# Altium PCB Flight-Controller.PcbDoc (part 1 of 3)
Units mm, origin at the board's own origin, x right, y up, seen from the top; angles counter-clockwise.
Board outline 68.4 x 90 mm, 8 copper layers (Top Layer (SIG), Int1 (GND), Int2 (PWR), Int3 (SIG), Int4 (GND), Int5 (SIG), Int6 (GND), Bottom Layer (SIG)), stack 1.559 mm thick; 188 components, 169 nets, 851 pads, 1097 vias.
Unrouted connection lines stored in the file: 2.
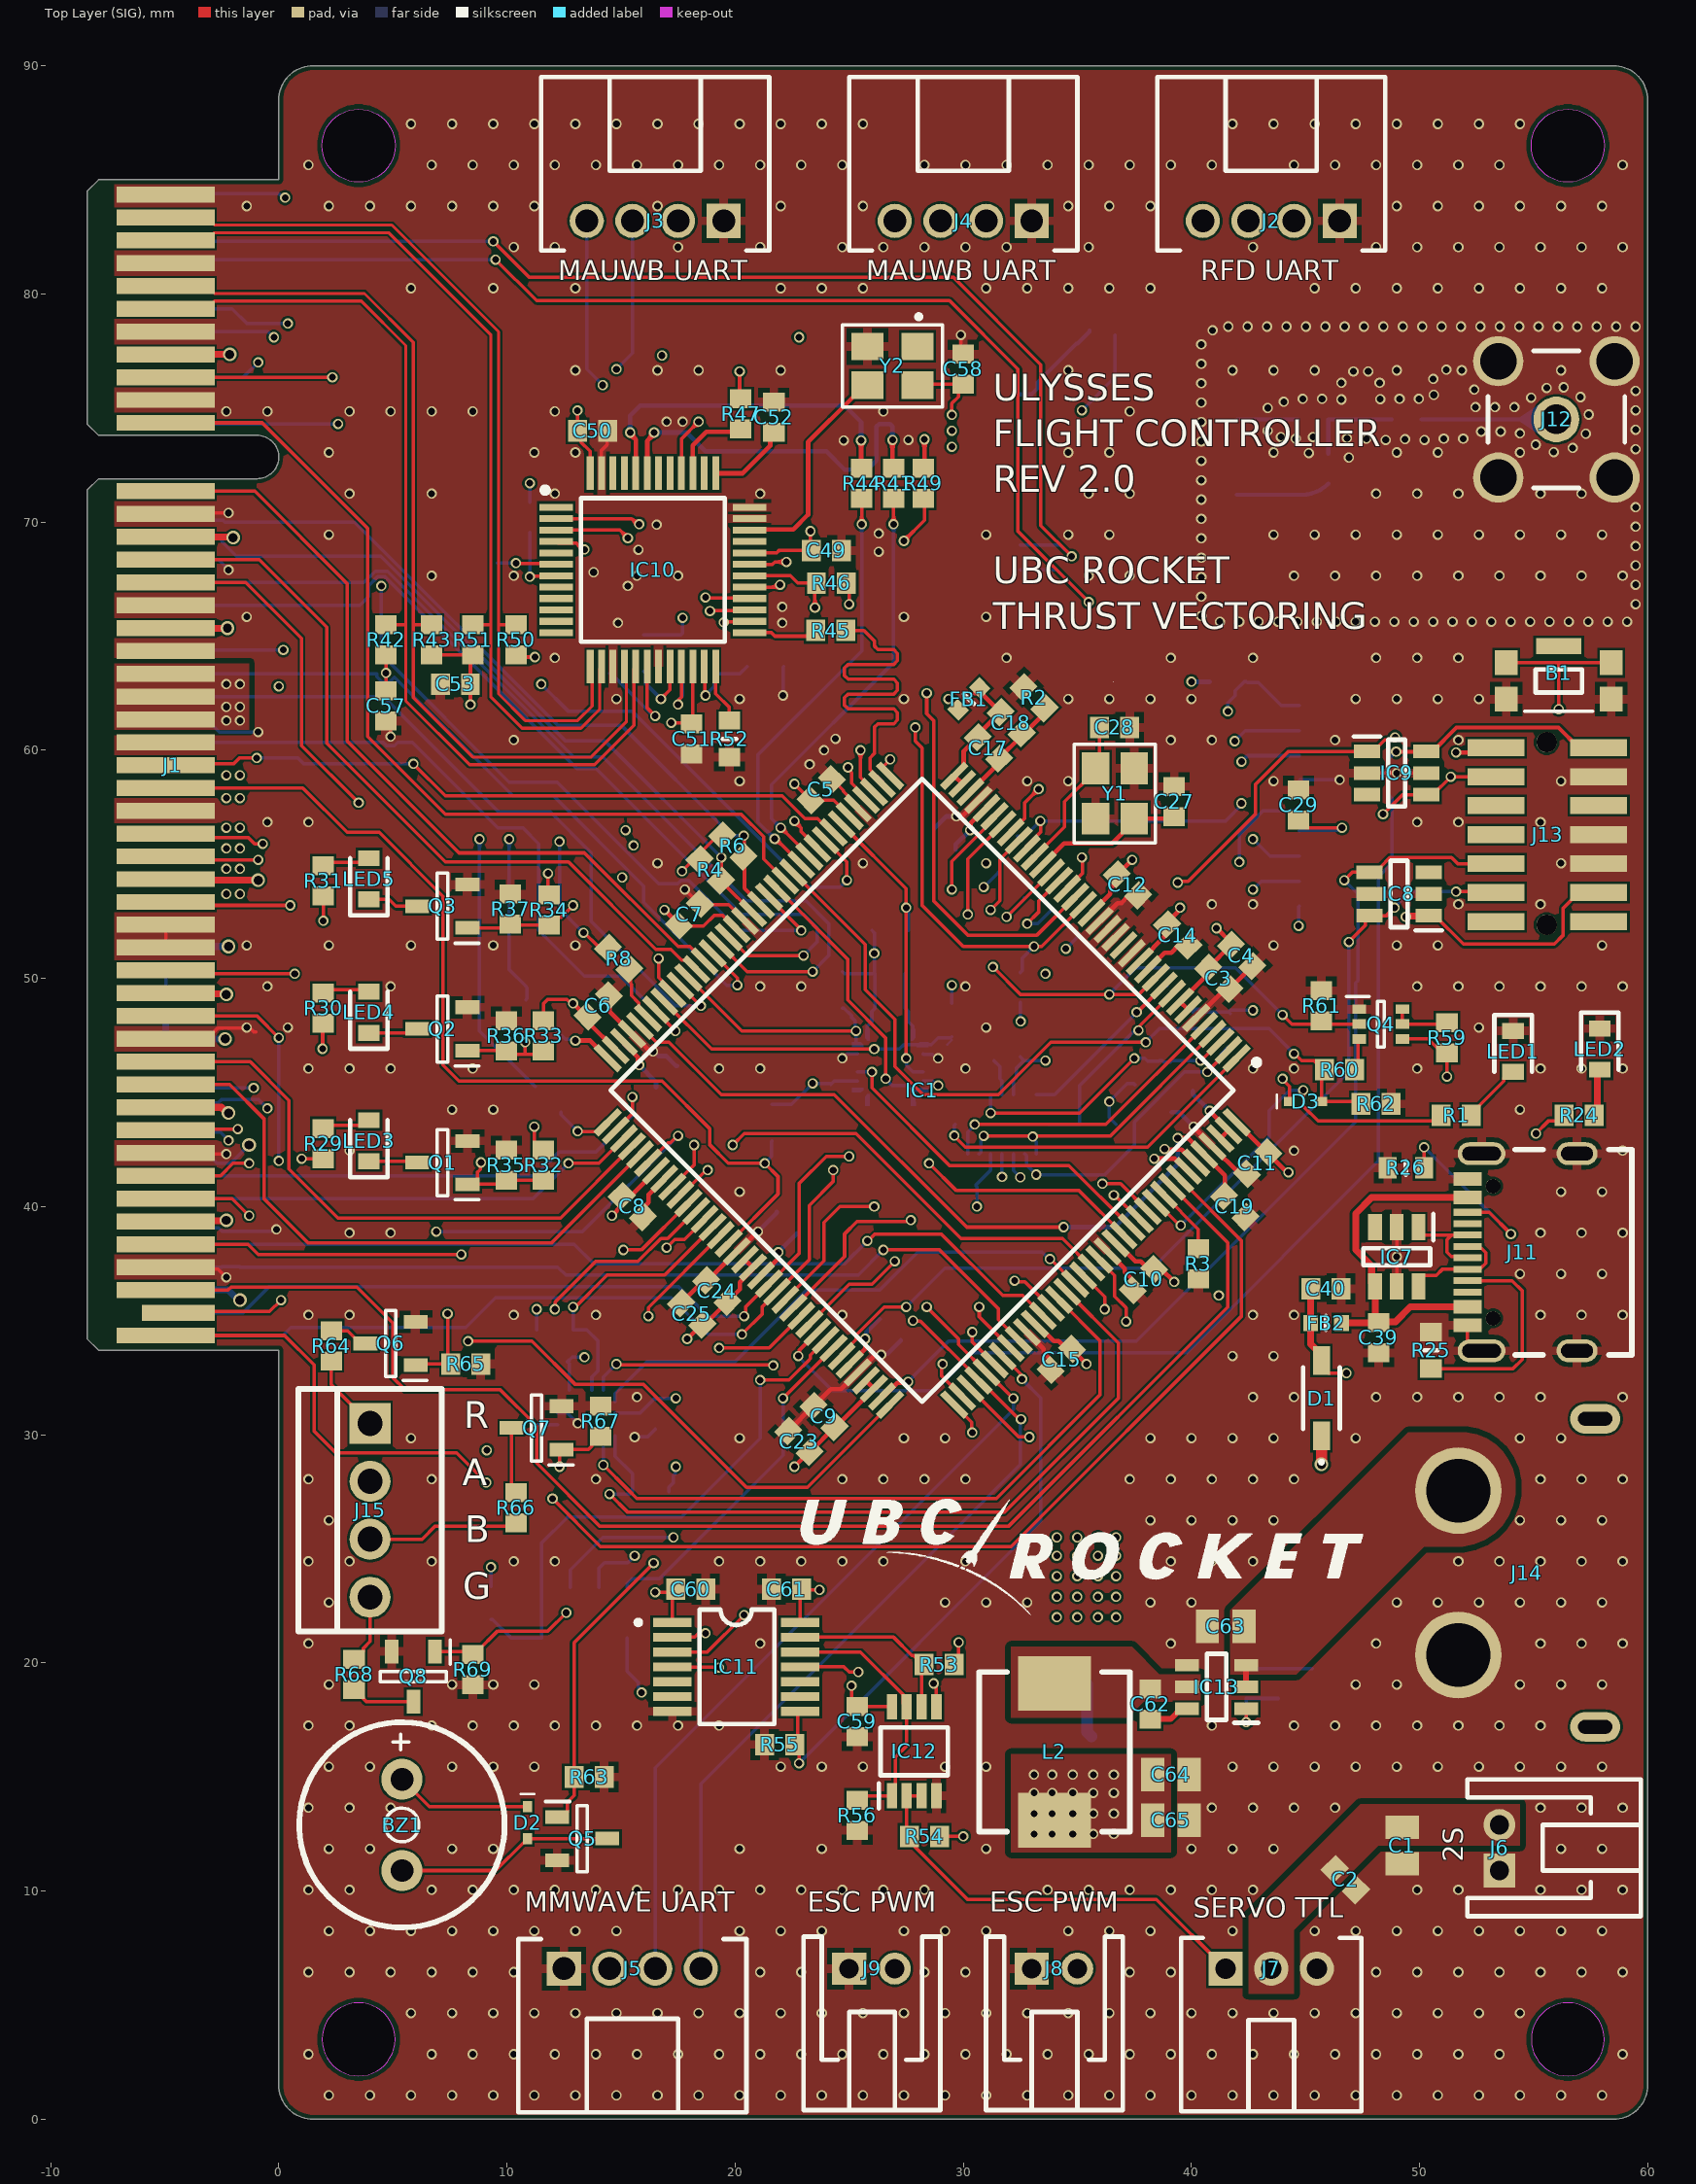
[diagram p0: Top Layer (SIG) view]
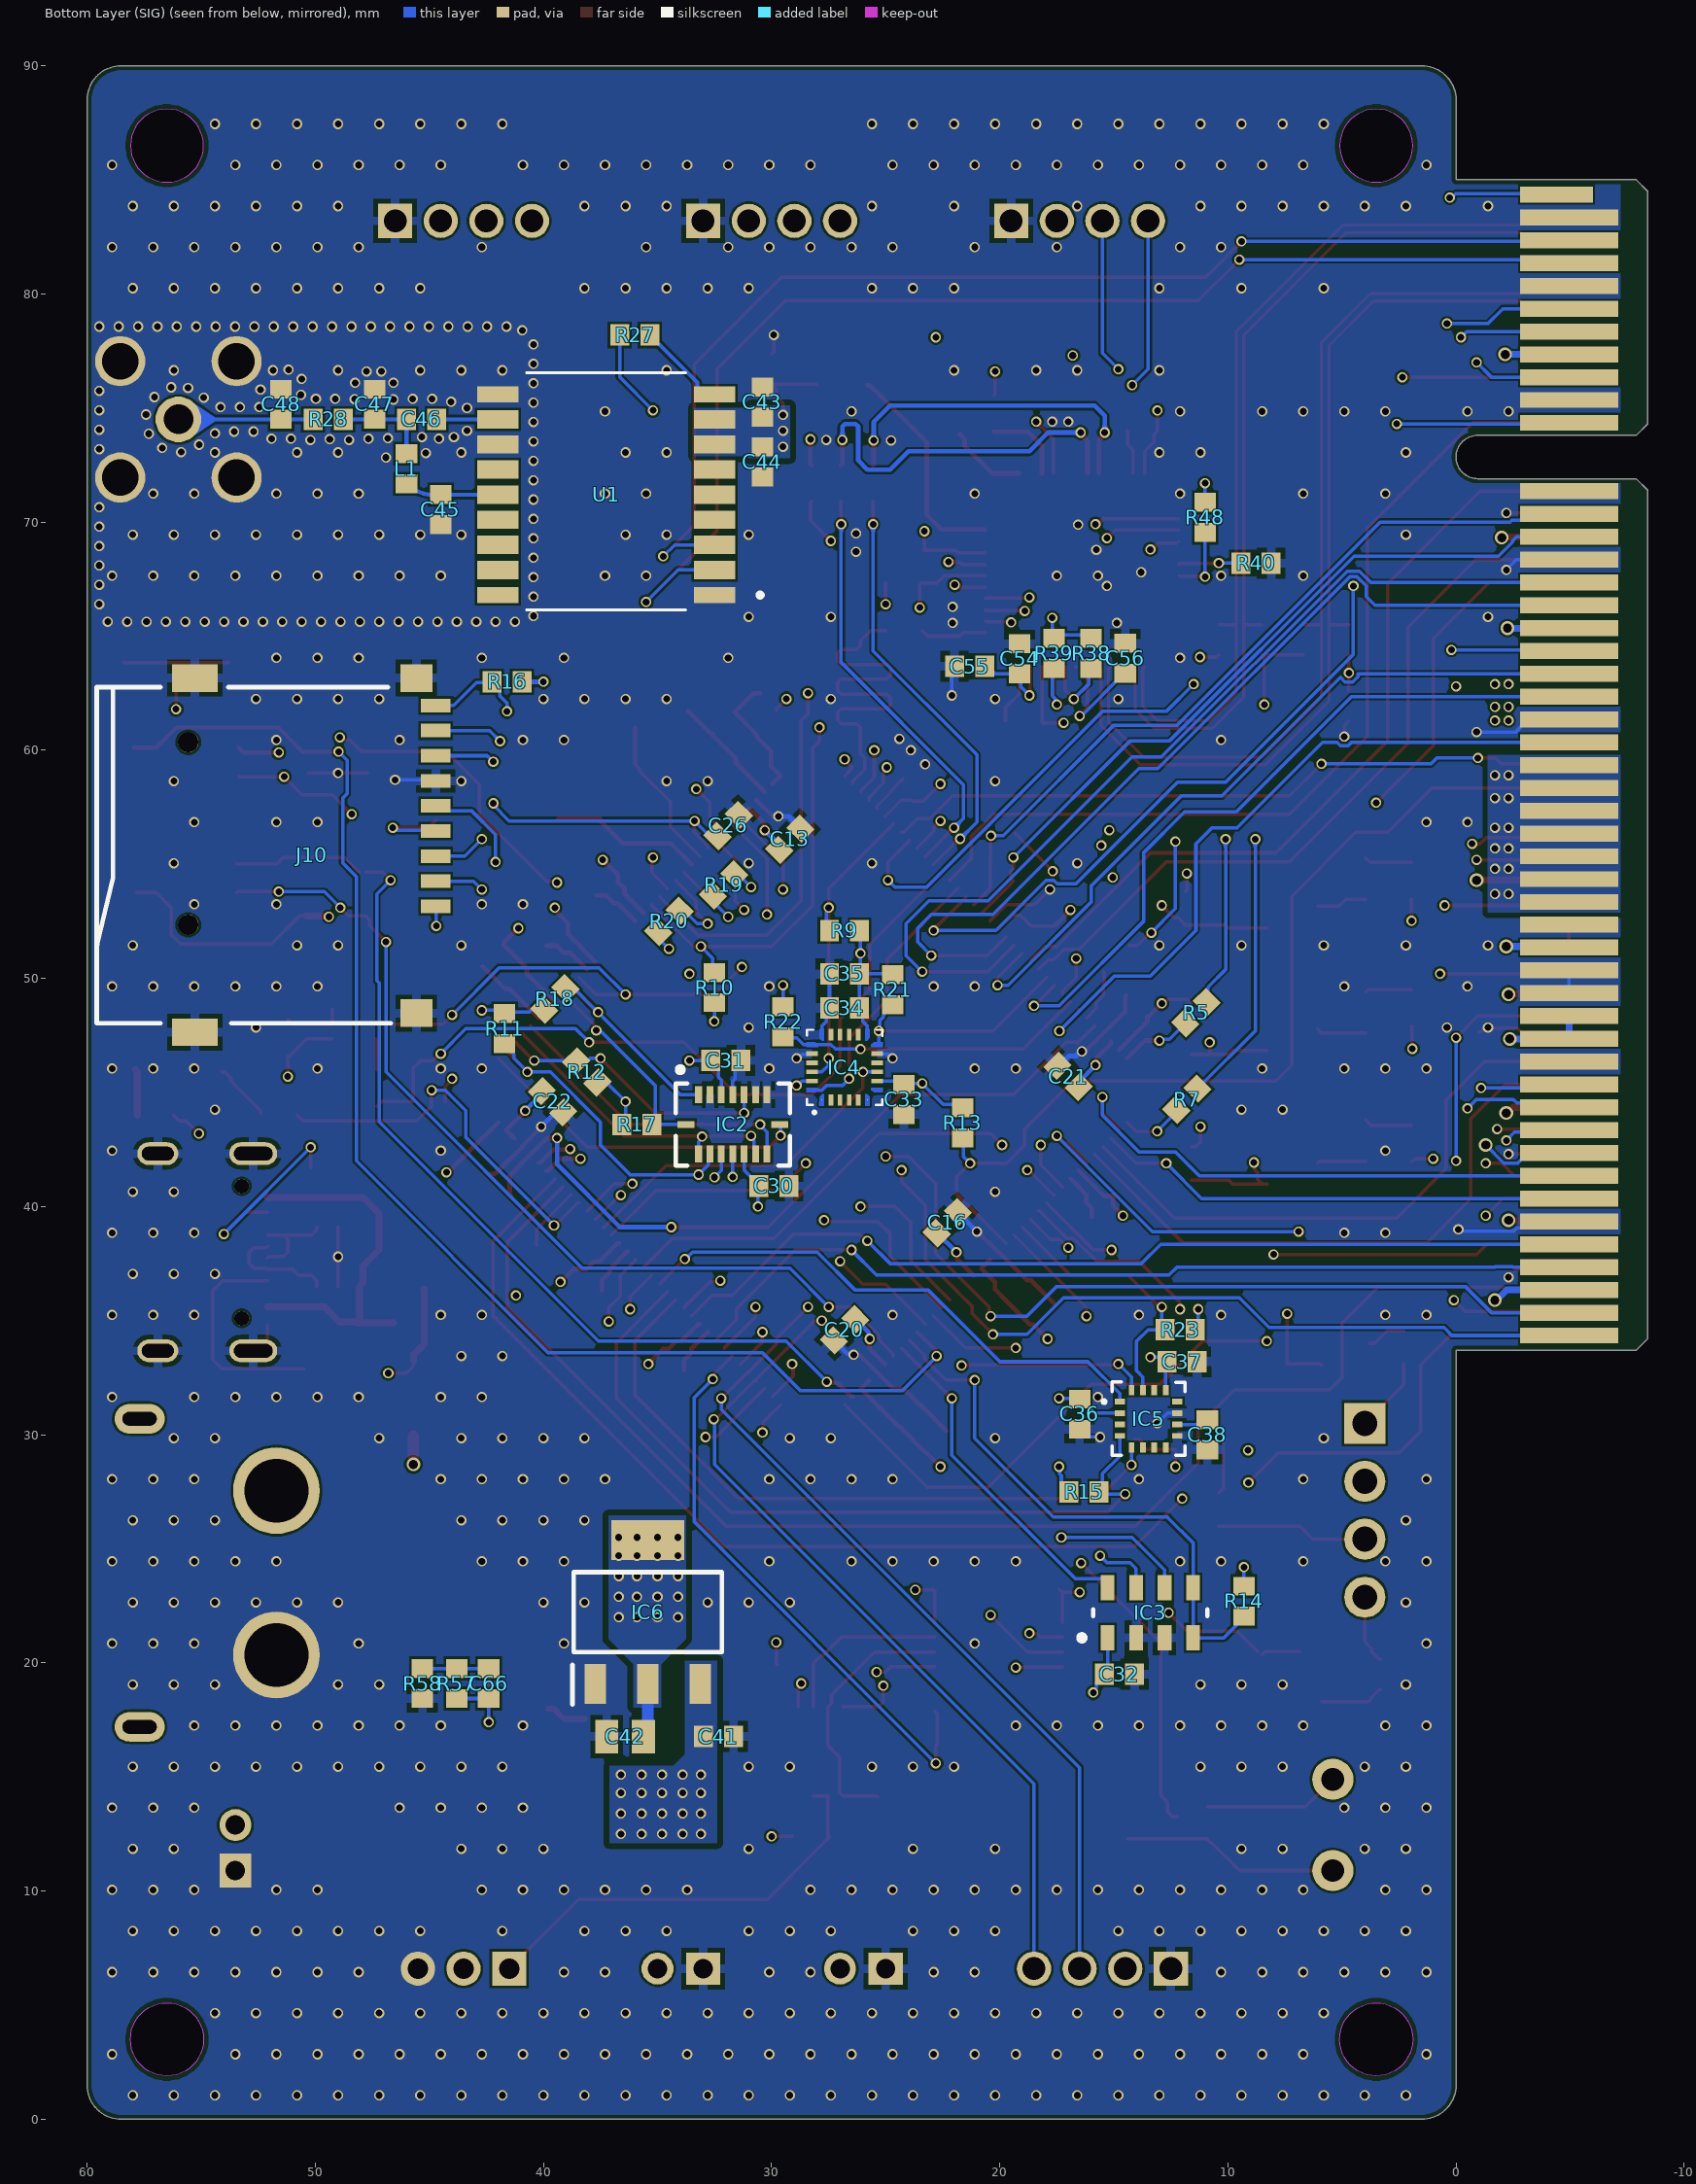
[diagram p1: Bottom Layer (SIG) view, seen from below]
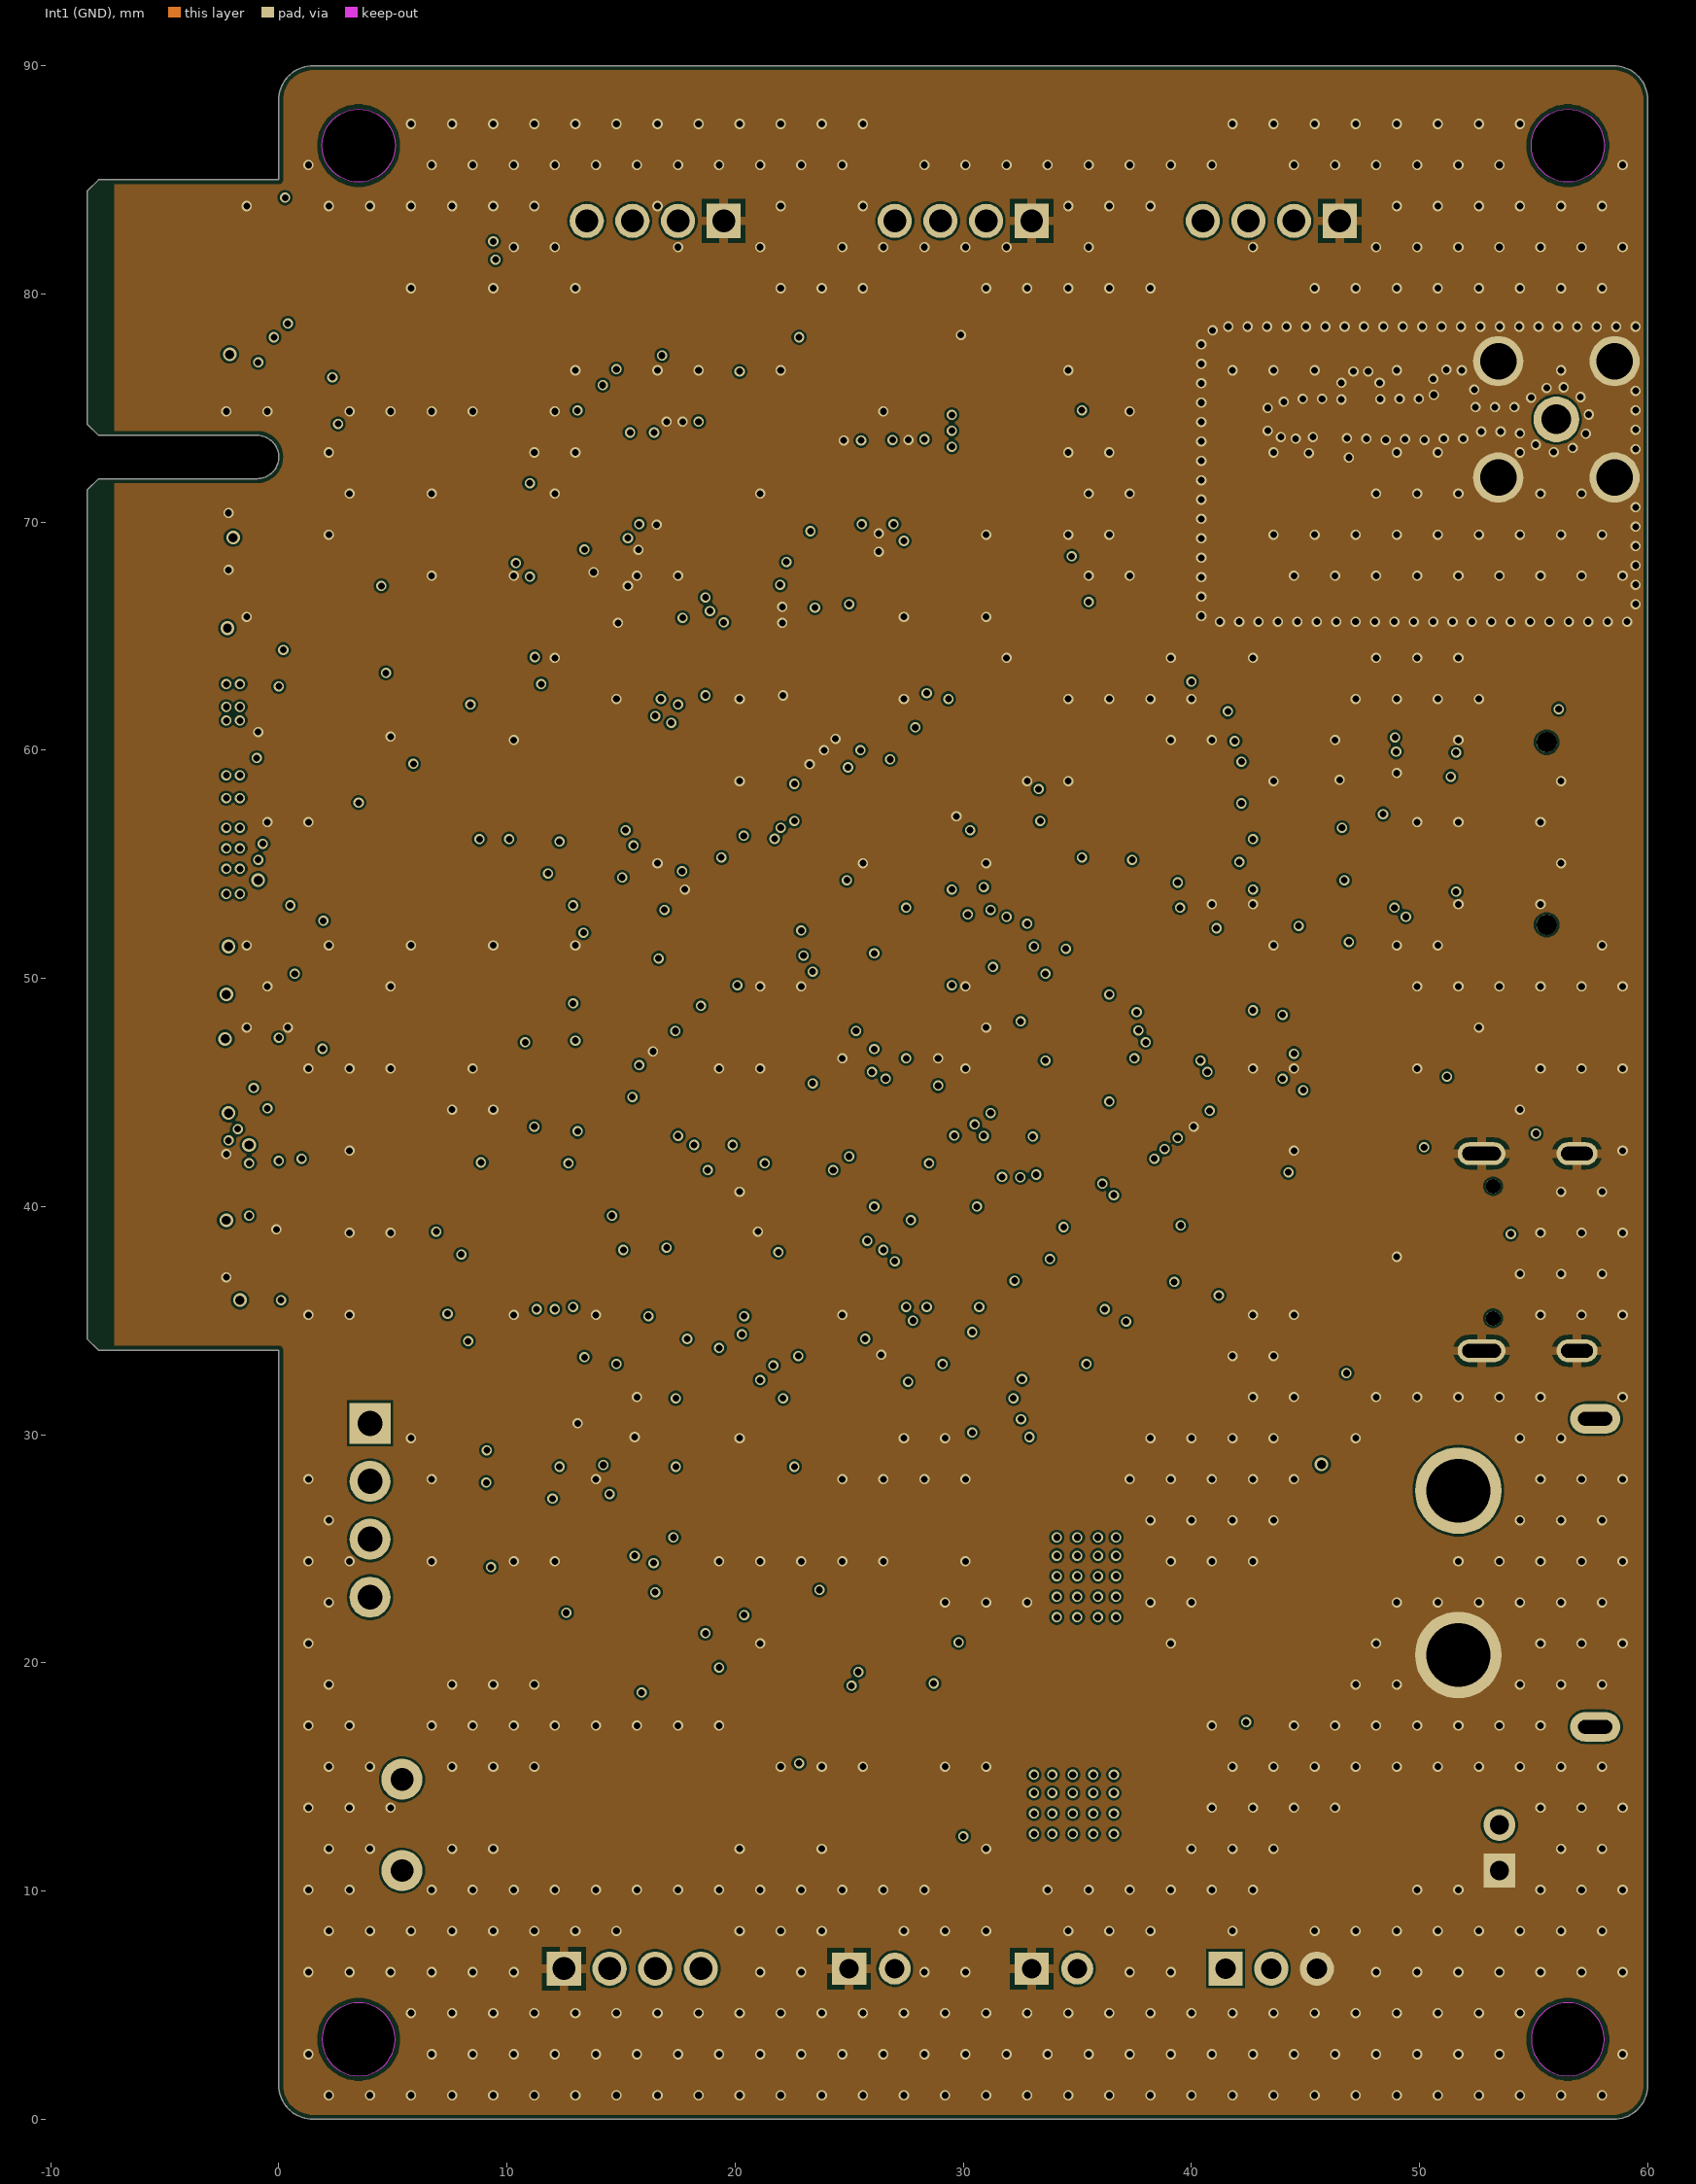
[diagram p2: Int1 (GND)]
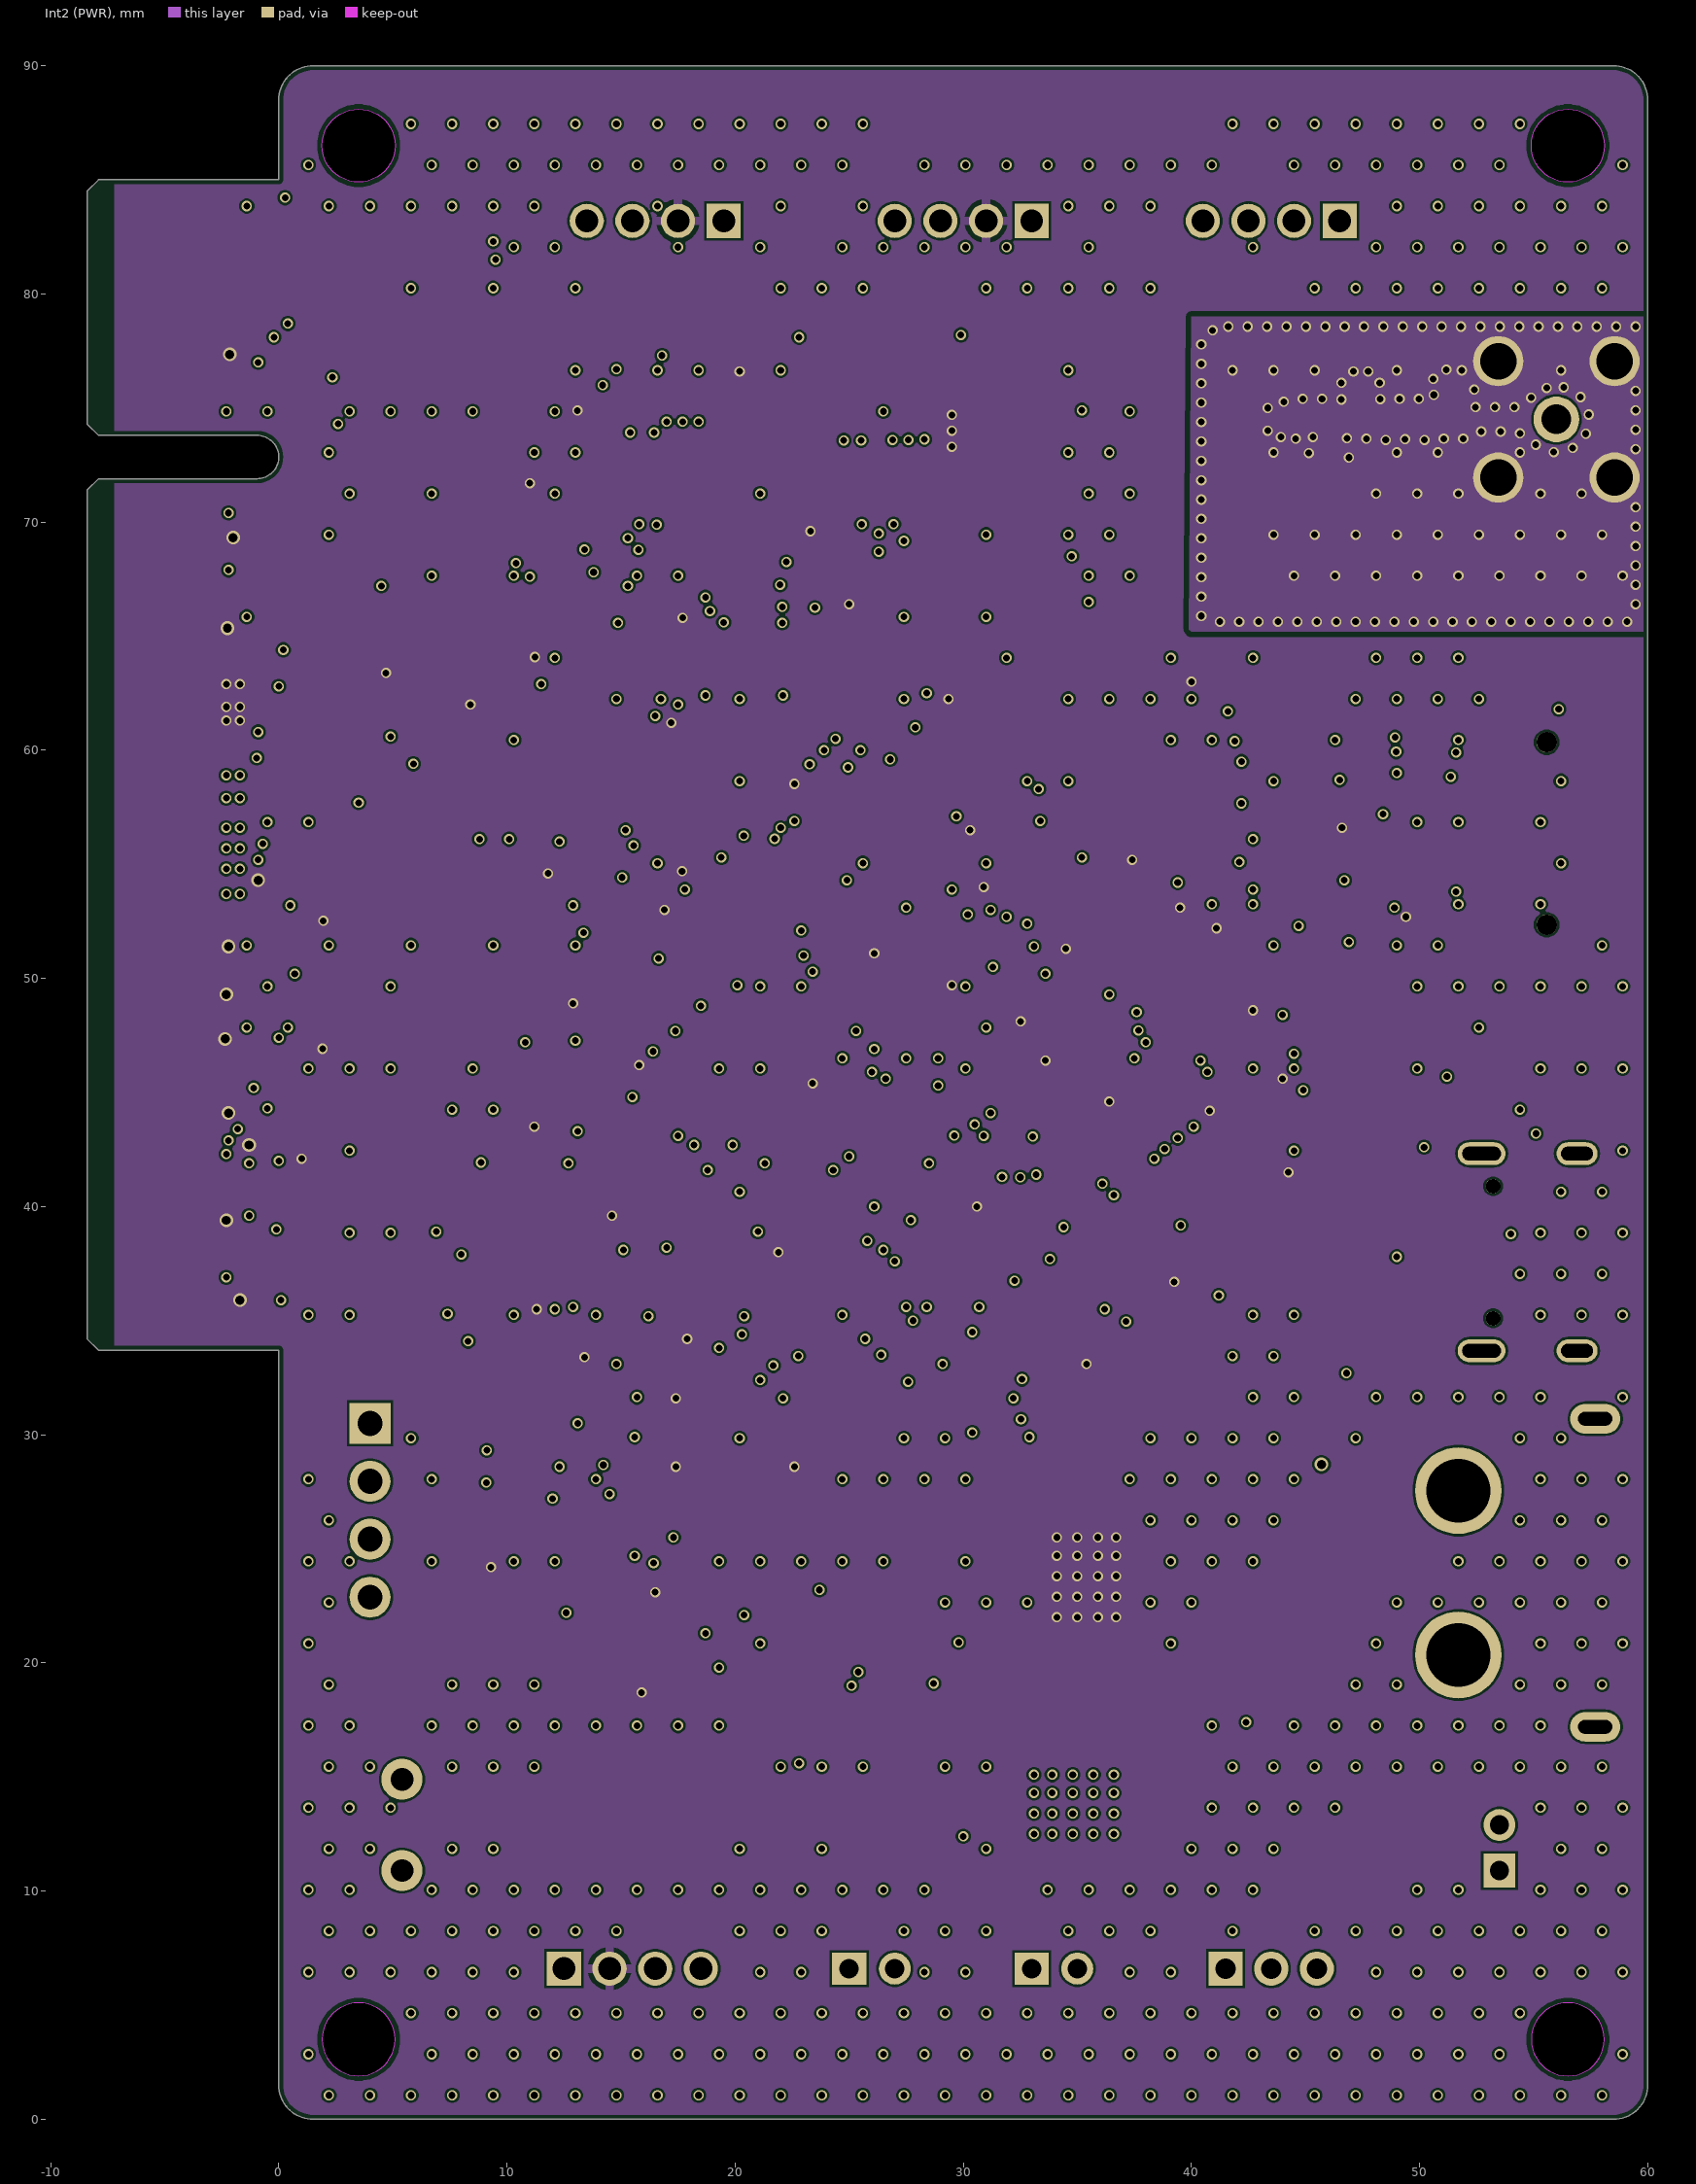
[diagram p3: Int2 (PWR)]
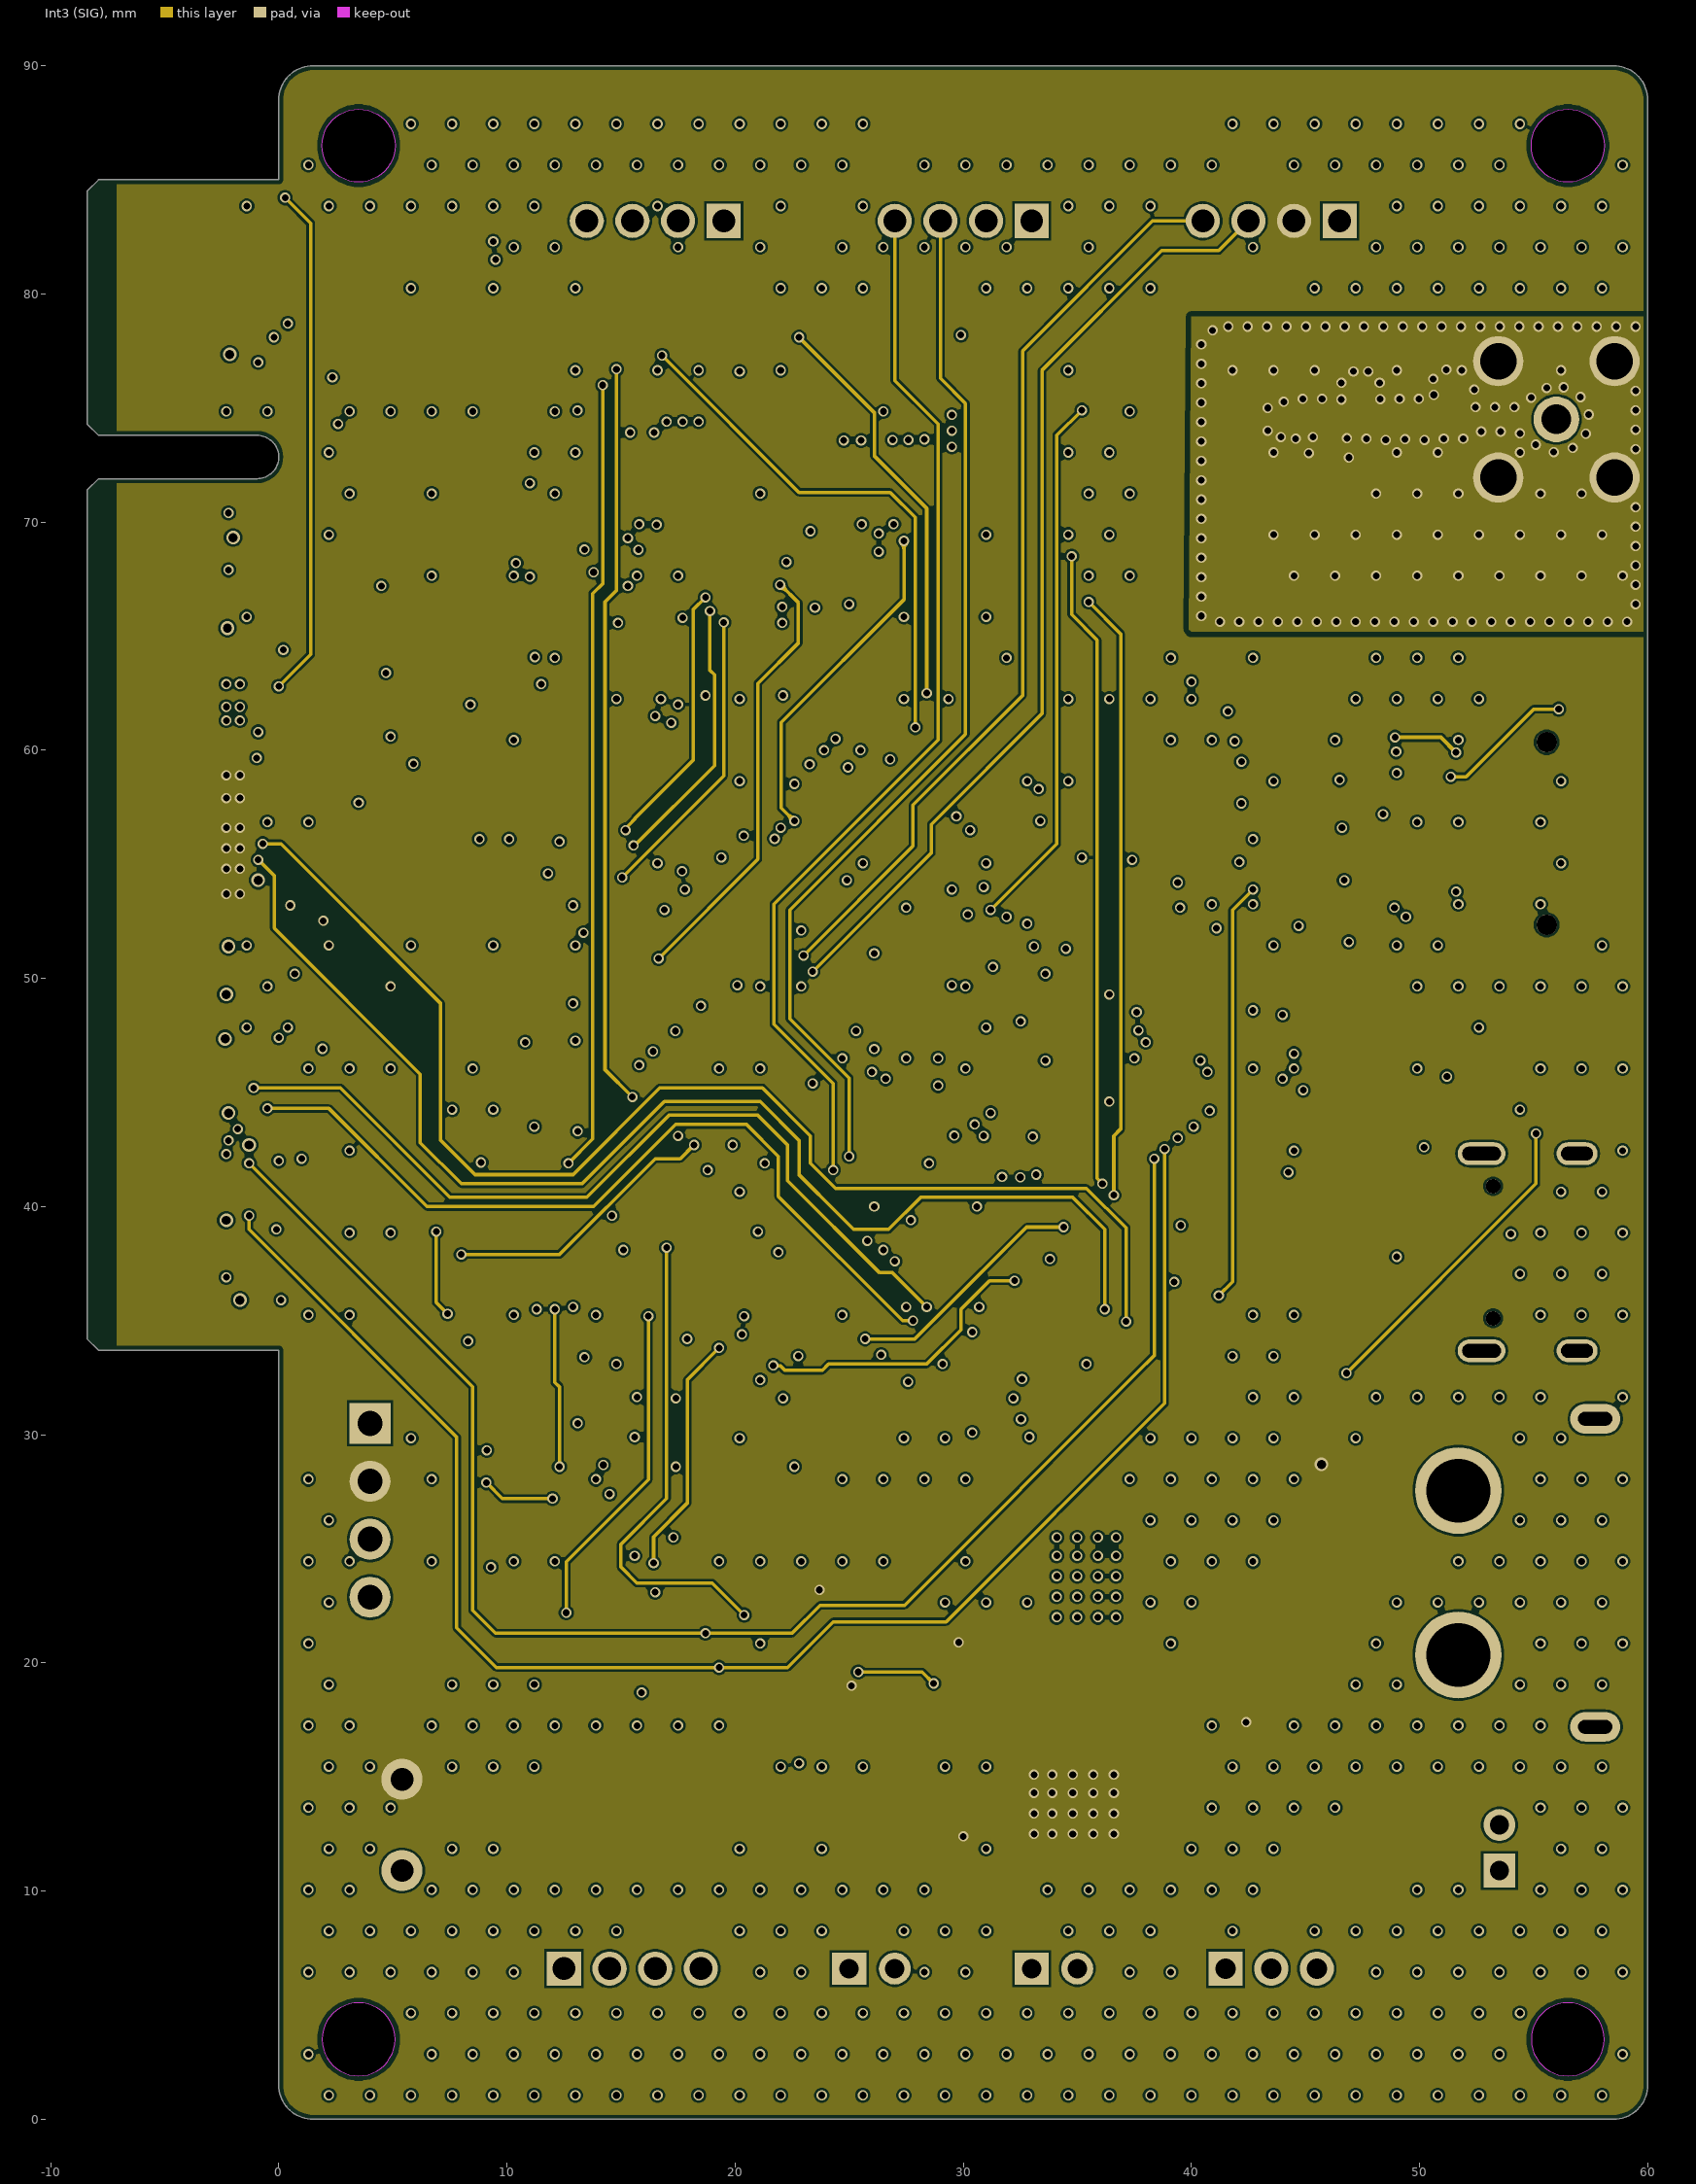
[diagram p4: Int3 (SIG)]
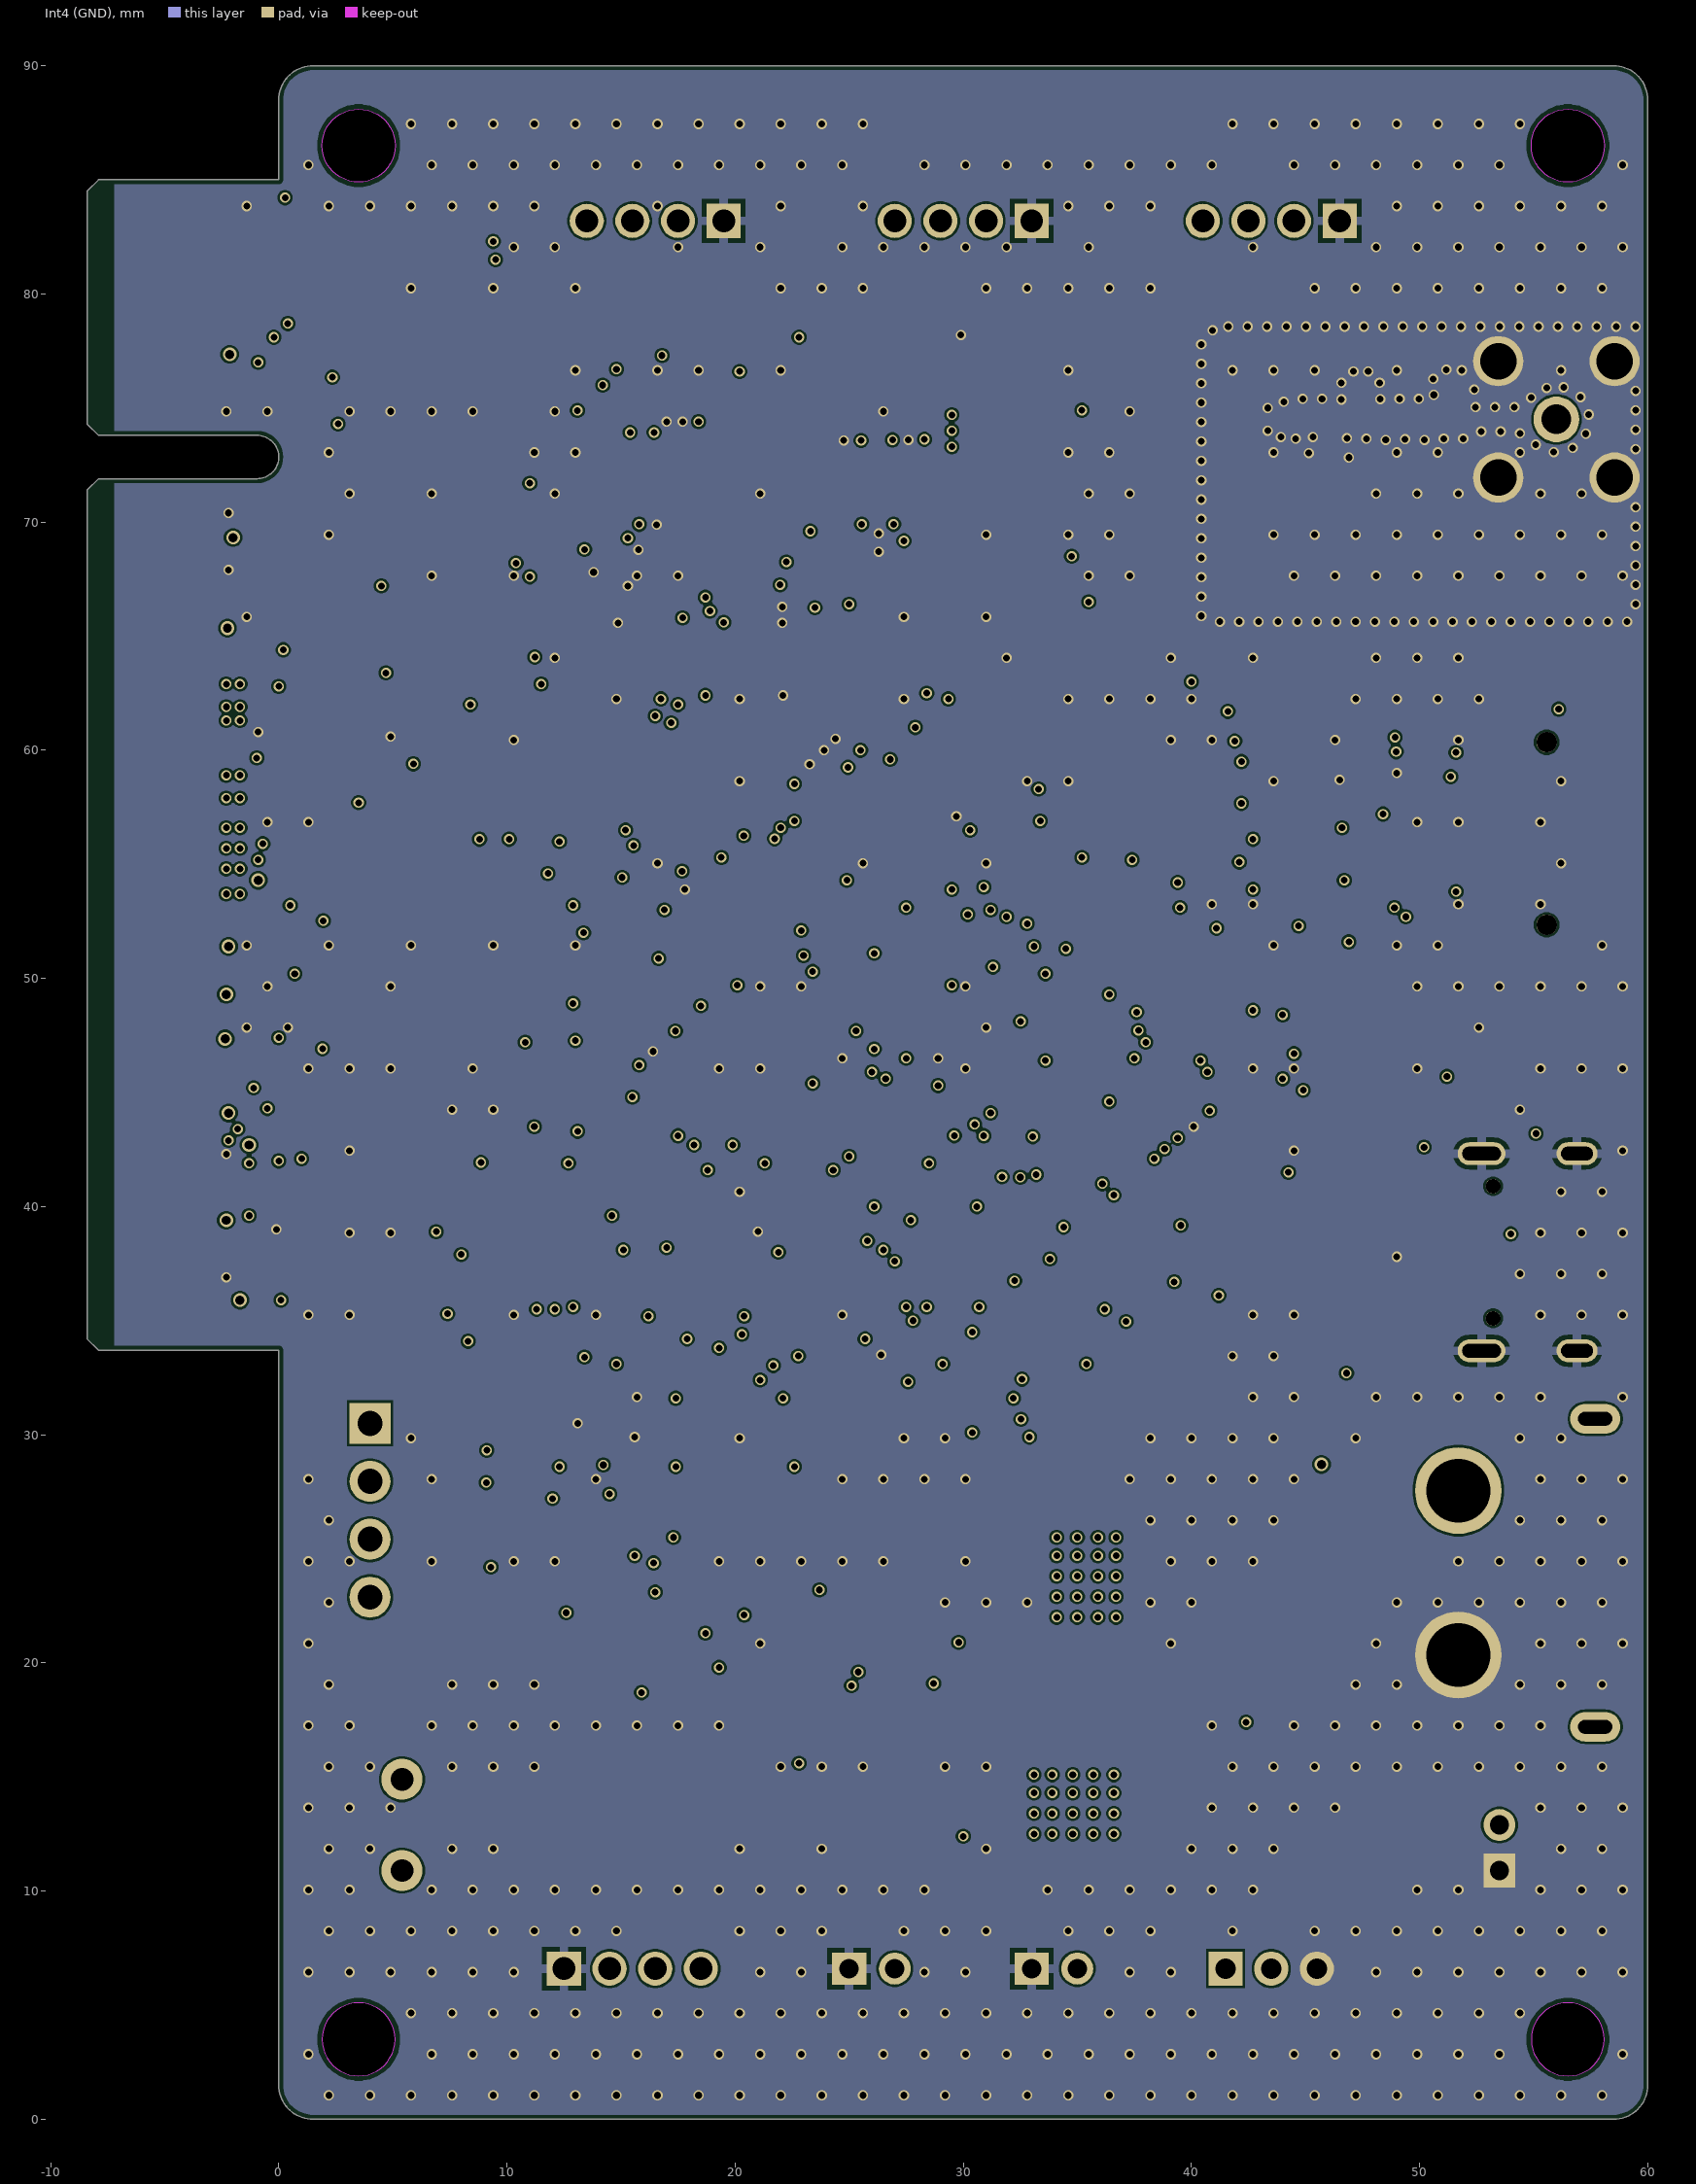
[diagram p5: Int4 (GND)]
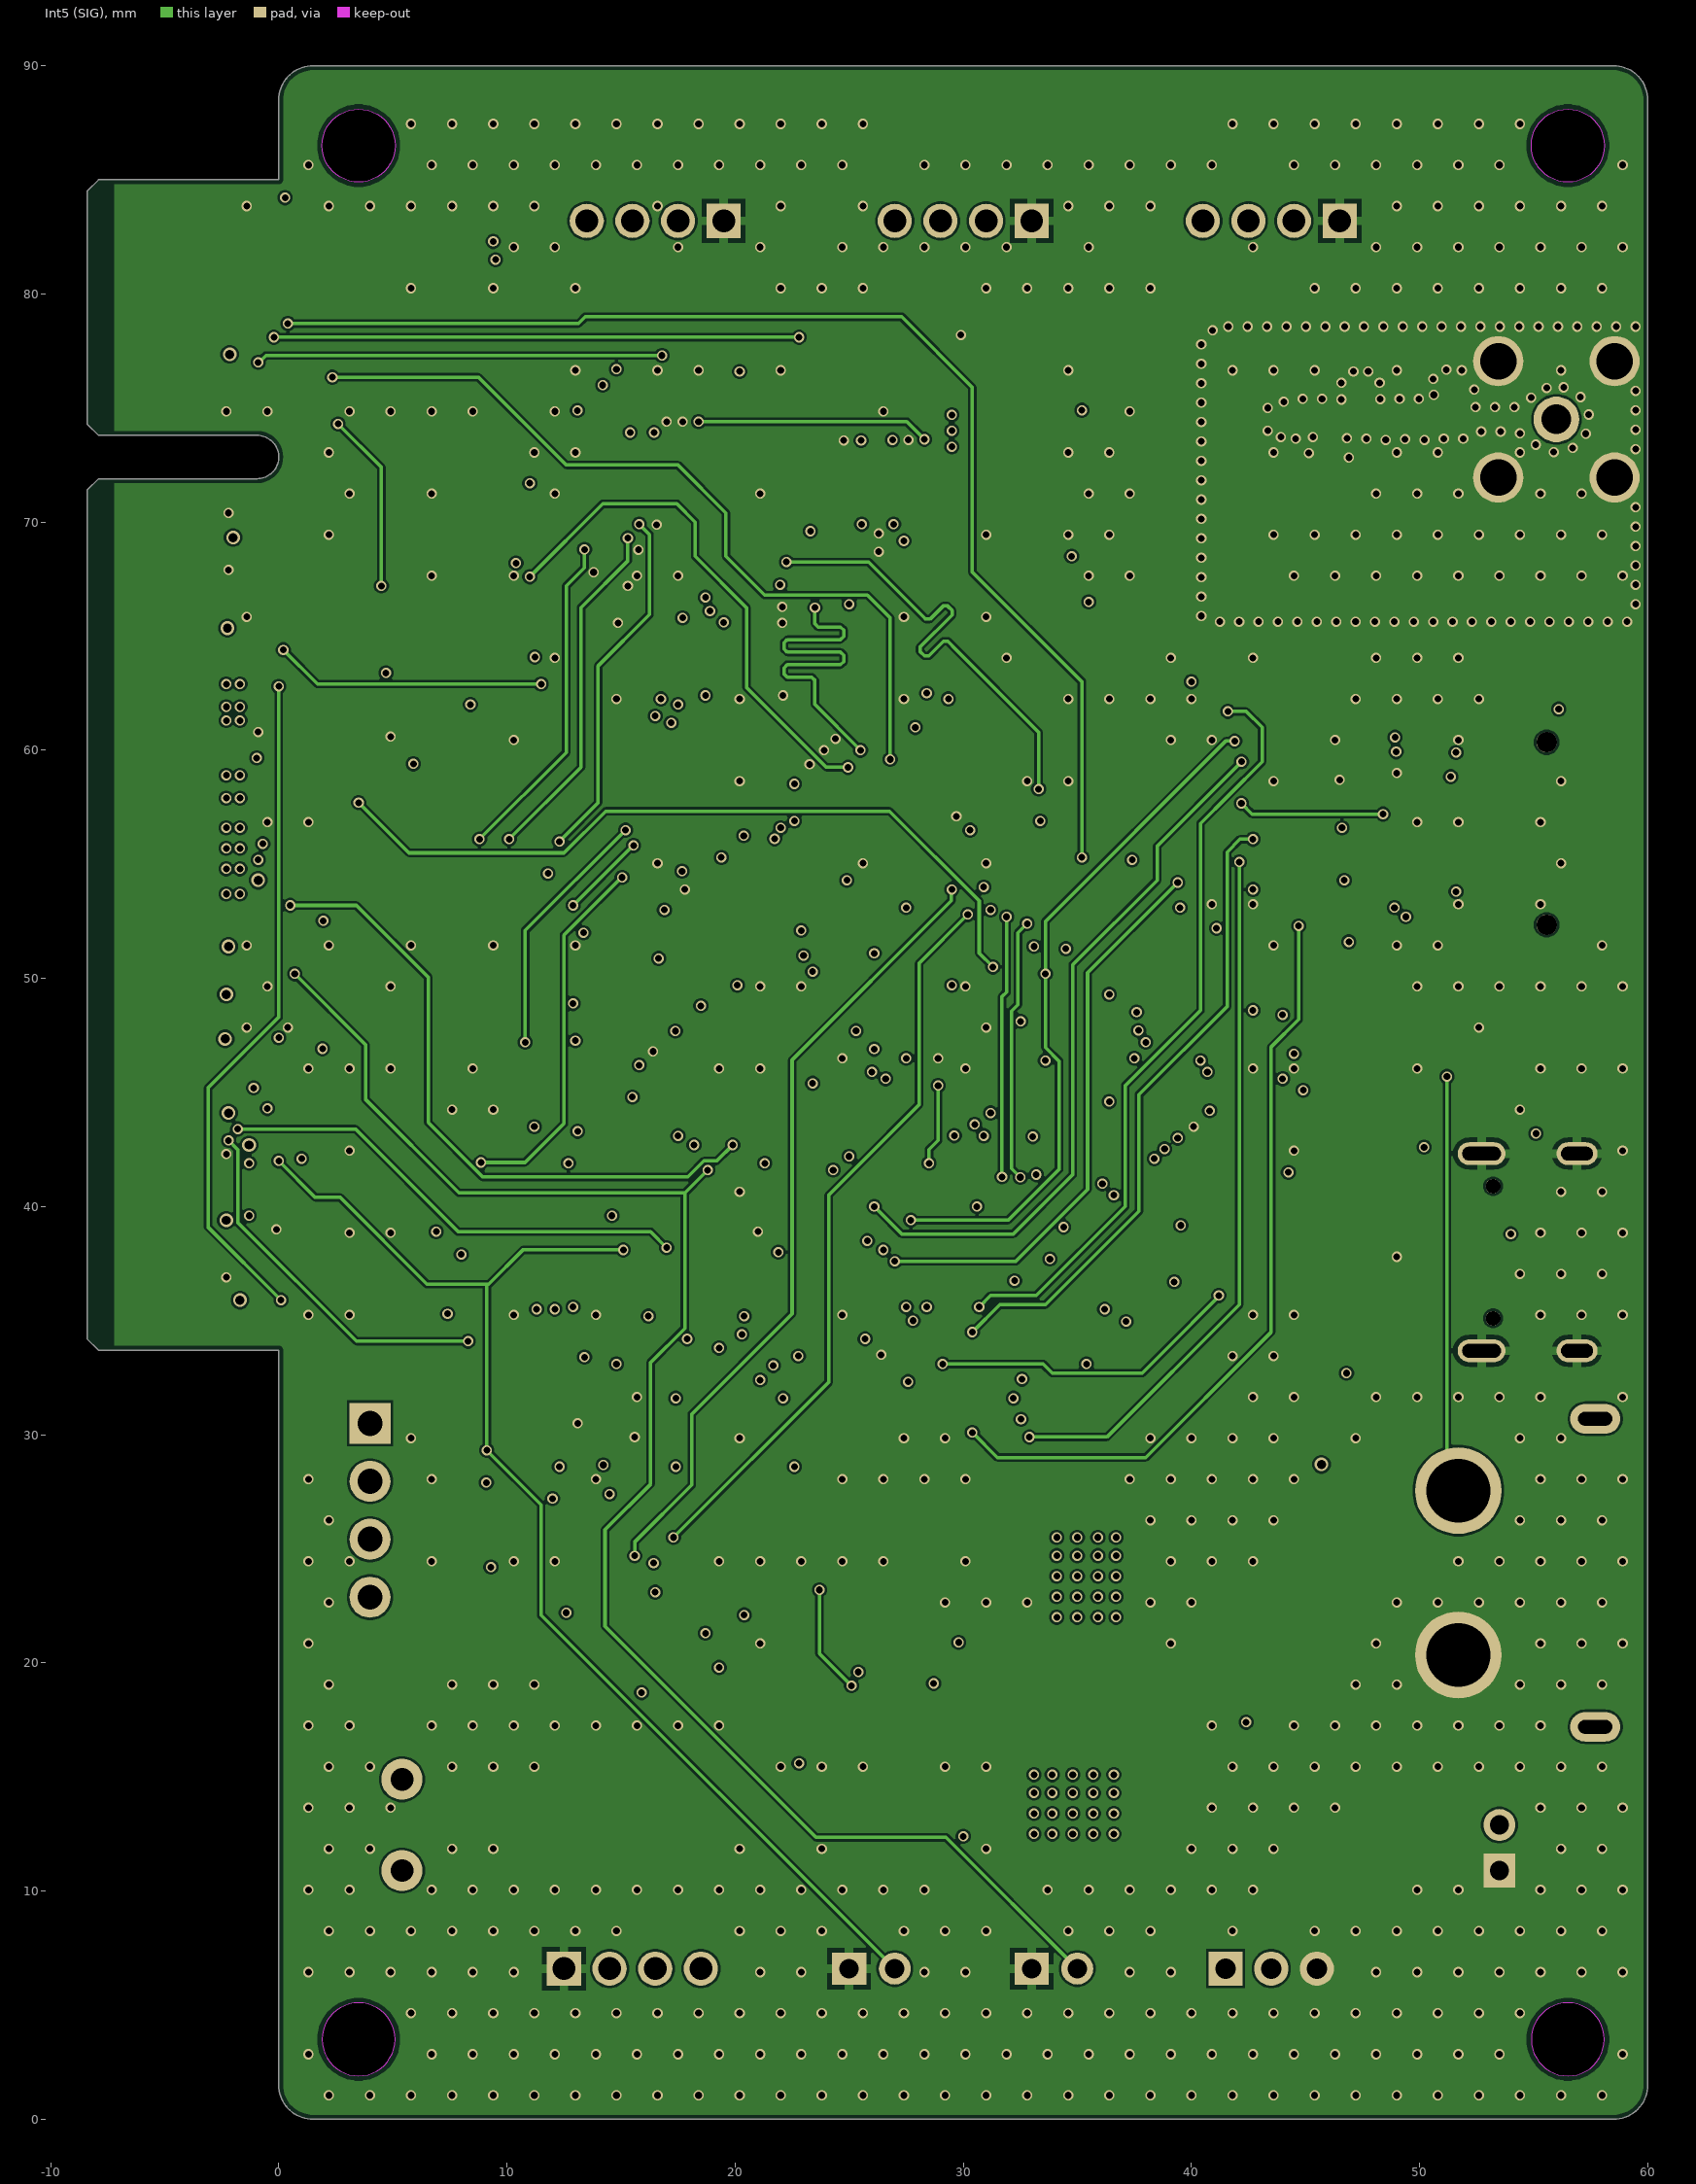
[diagram p6: Int5 (SIG)]
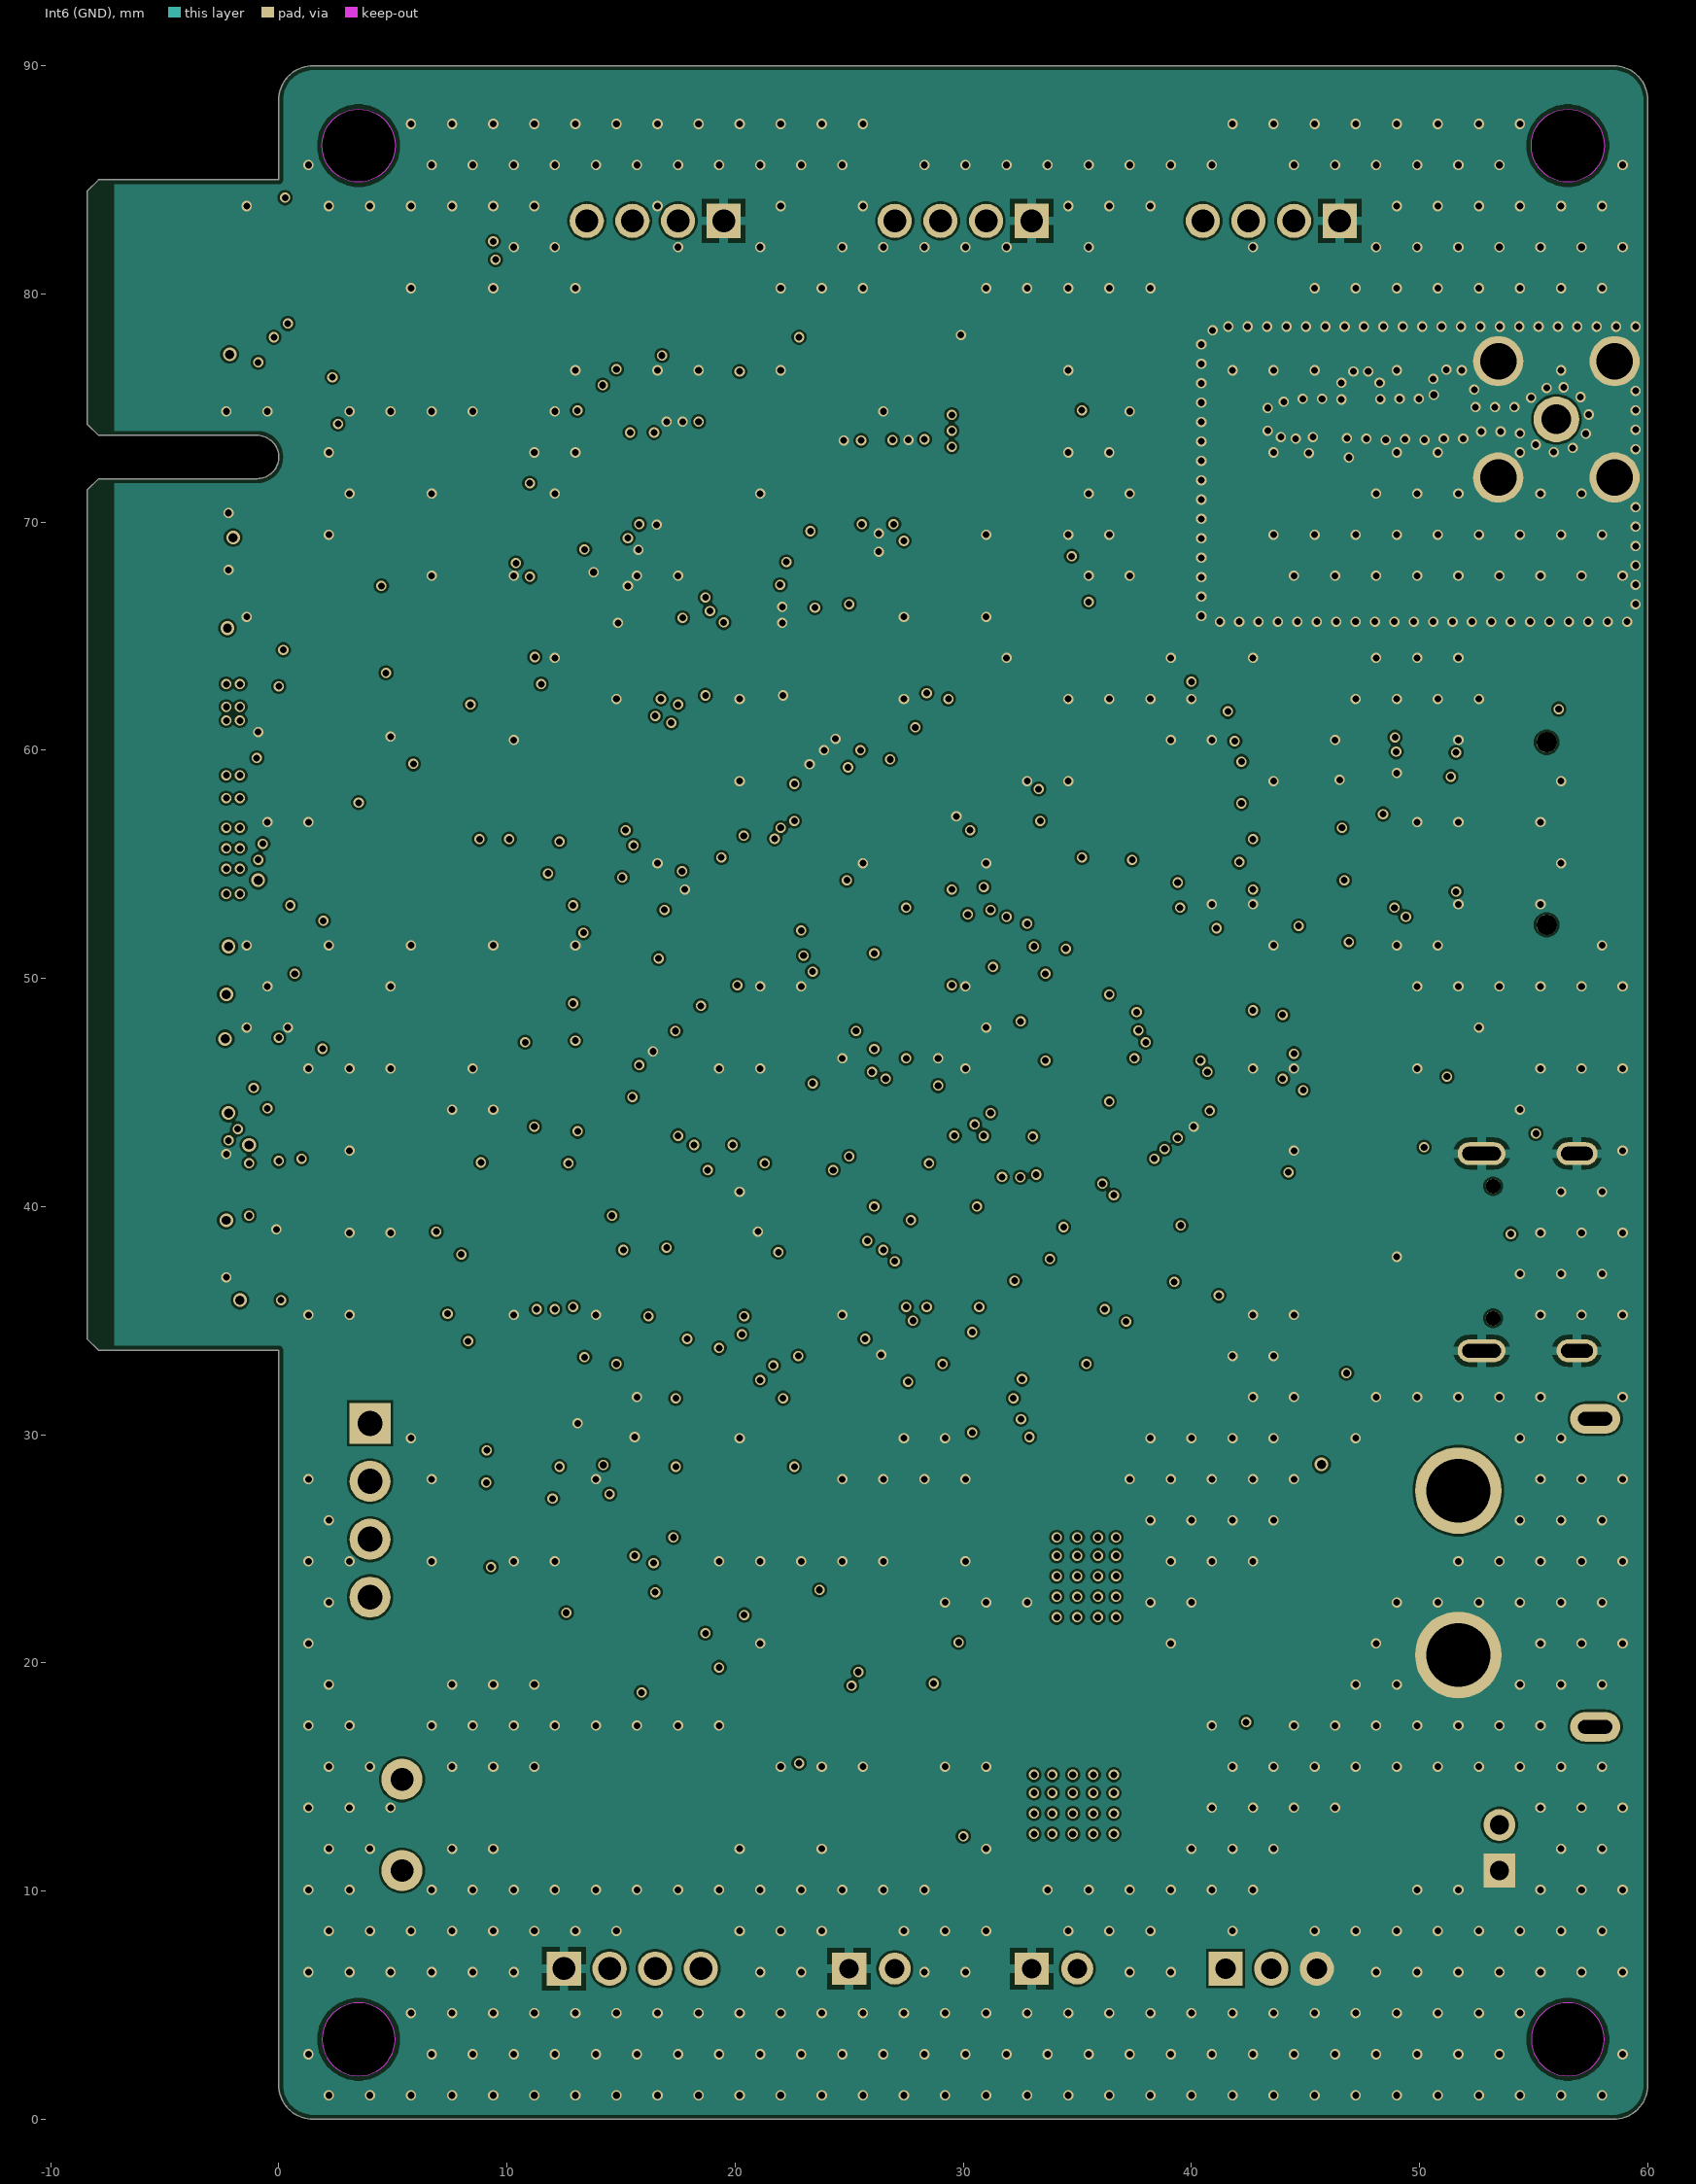
[diagram p7: Int6 (GND)]
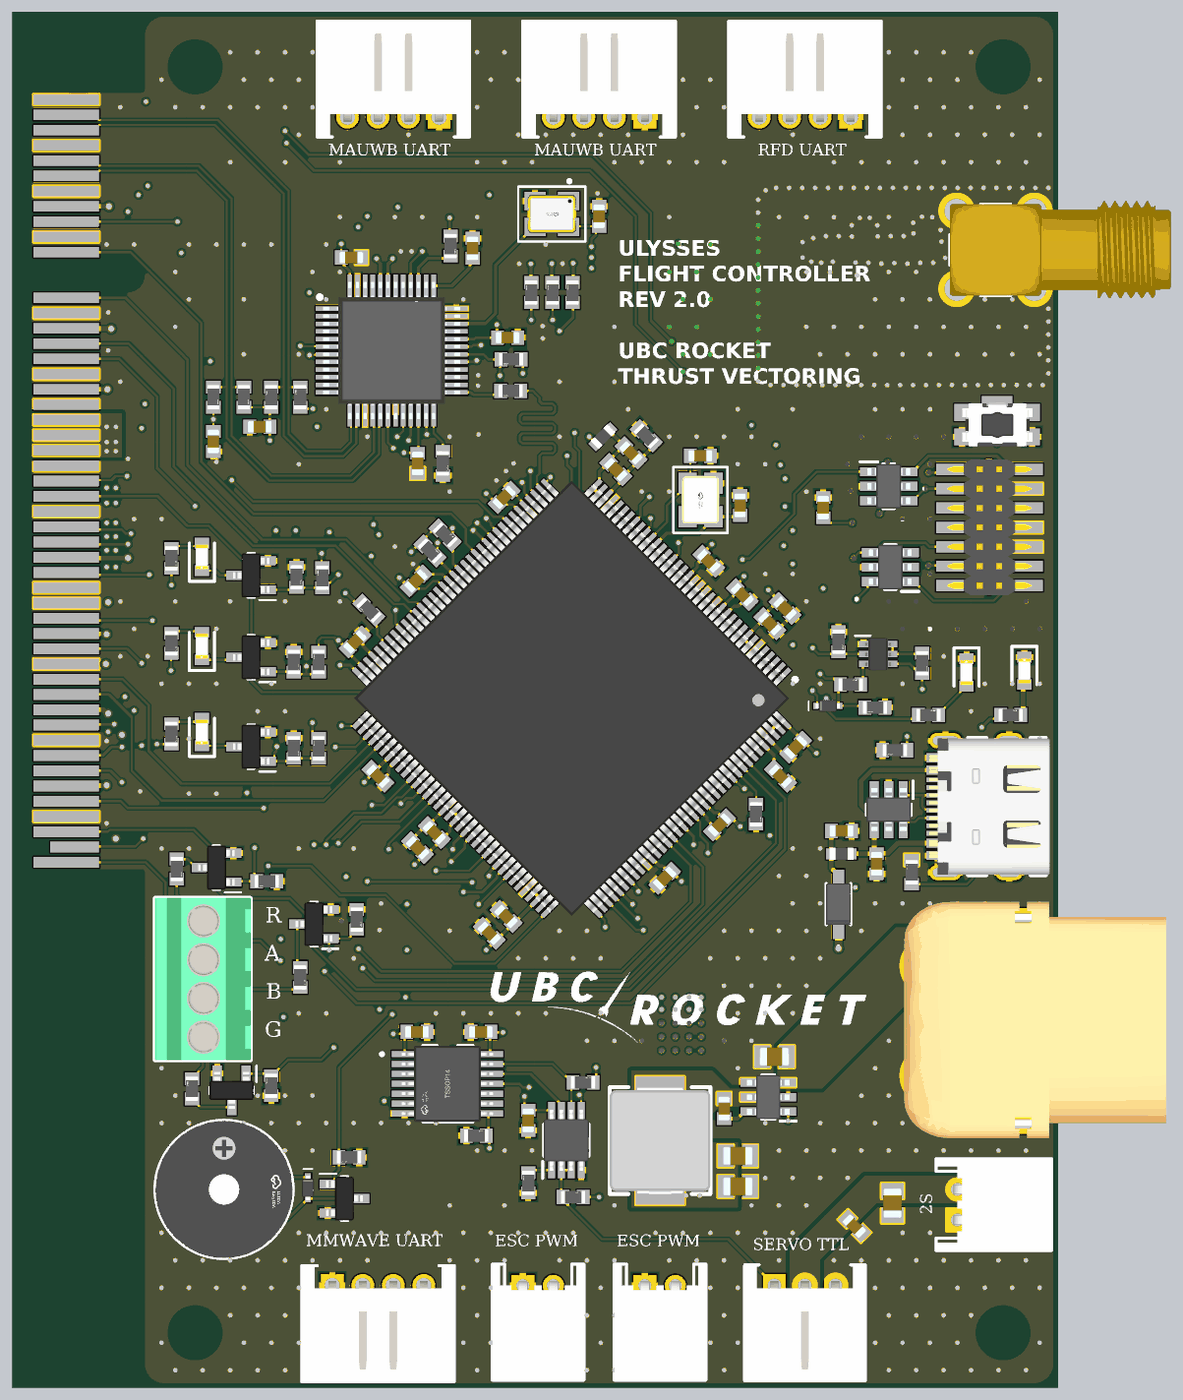
[diagram p10: 3D render of the assembled board from above, using the file's embedded part models]
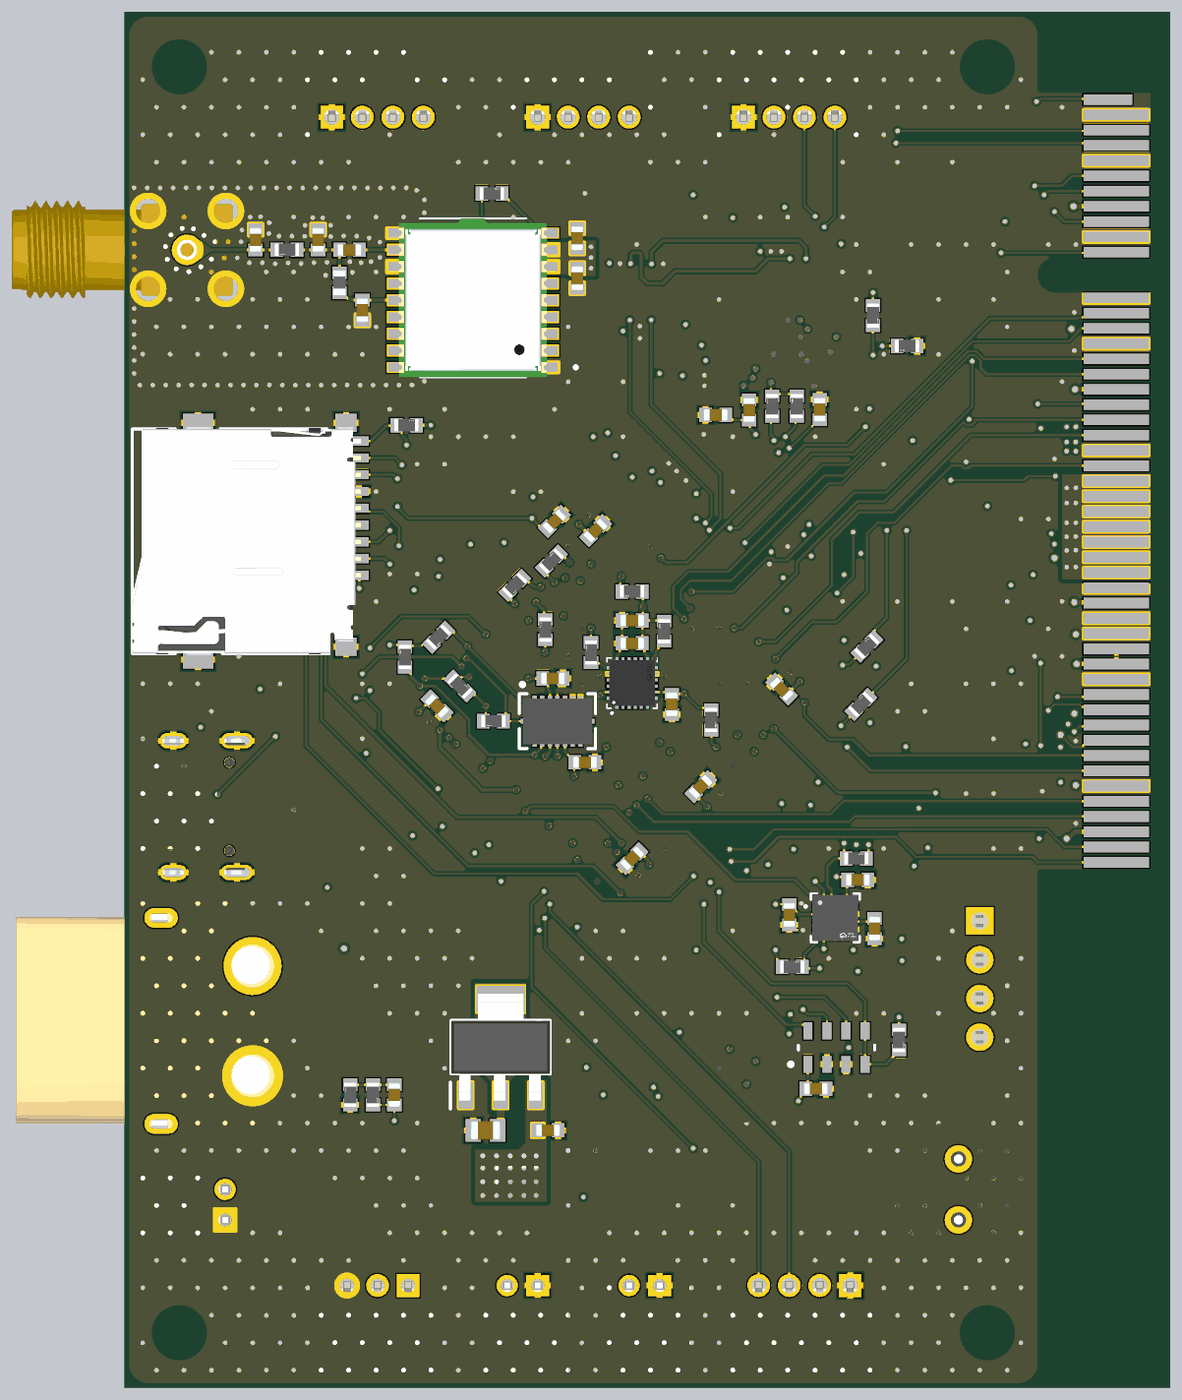
[diagram p11: 3D render of the assembled board from below, using the file's embedded part models]

## Layer stack, top to bottom
Top Solder: solder mask 0.0254, SM-001, Dk 4
Top Layer (SIG): signal copper 0.035
Dielectric 1: prepreg 0.1195, PP-016, Dk 4.45
Int1 (GND): signal copper 0.035
Dielectric 2: core 0.23, Core-035, Dk 4.6
Int2 (PWR): signal copper 0.035
Dielectric 3: prepreg 0.175, PP-022, Dk 4.74
Int3 (SIG): signal copper 0.035
Dielectric 4: core 0.23, Core-009, Dk 4.6
Int4 (GND): signal copper 0.035
Dielectric 5: prepreg 0.175, PP-006, Dk 4.74
Int5 (SIG): signal copper 0.035
Dielectric 6: core 0.23, Core-009, Dk 4.6
Int6 (GND): signal copper 0.035
Dielectric 7: prepreg 0.1195, PP-016, Dk 4.45
Bottom Layer (SIG): signal copper 0.035
Bottom Solder: solder mask 0.0254, SM-001, Dk 4

## Board outline
-7.9,33.7 -8.4,34.2 -8.4,71.4 -7.9,71.9 -0.95,71.9 ccw(c-0.95,72.85) 0,72.85 ccw(c-0.95,72.85) -0.95,73.8 -7.9,73.8 -8.4,74.3 -8.4,84.5 -7.9,85 0,85 0,88.5 cw(c1.5,88.5) 1.5,90 58.5,90 cw(c58.5,88.5) 60,88.5 60,1.5 cw(c58.5,1.5) 58.5,0 1.5,0 cw(c1.5,1.5) 0,1.5 0,33.7
cut-out: 56.5,84.9 cw(c56.5,86.5) 54.9,86.5 cw(c56.5,86.5) 56.5,88.1 cw(c56.5,86.5) 58.1,86.5 cw(c56.5,86.5)
cut-out: 54.9,3.5 ccw(c56.5,3.5) 56.5,1.9 ccw(c56.5,3.5) 58.1,3.5 ccw(c56.5,3.5) 56.5,5.1 ccw(c56.5,3.5)
cut-out: 3.5,84.9 cw(c3.5,86.5) 1.9,86.5 cw(c3.5,86.5) 3.5,88.1 cw(c3.5,86.5) 5.1,86.5 cw(c3.5,86.5)
cut-out: 1.9,3.5 ccw(c3.5,3.5) 3.5,1.9 ccw(c3.5,3.5) 5.1,3.5 ccw(c3.5,3.5) 3.5,5.1 ccw(c3.5,3.5)

## Design rules (kind name [scope] priority, off if disabled: settings)
BoardOutlineClearance [All] p1: gap=0.2 ignorepadtopadclearanceinfootprint=FALSE
Clearance [All] p1: gap=0.1 ignorepadtopadclearanceinfootprint=FALSE except(0.25: Poly-Poly)
DiffPairsRouting [All] p1: maxlimit=0.2 minlimit=0.127 mostfreqgap=0.127 toplayer_mingap=0.2 toplayer_prefgap=0.2 toplayer_minwidth=0.135 toplayer_maxwidth=0.135 toplayer_prefwidth=0.135 midlayer1_maxgap=0.127 midlayer1_minwidth=0.054 midlayer1_maxwidth=0.054 midlayer1_prefwidth=0.054 midlayer2_maxgap=0.127 midlayer2_minwidth=0.054 midlayer2_maxwidth=0.054 midlayer2_prefwidth=0.054 midlayer3_maxgap=0.127 midlayer3_minwidth=0.05 midlayer3_maxwidth=0.05 midlayer3_prefwidth=0.05 midlayer4_maxgap=0.127 midlayer4_minwidth=0.054 midlayer4_maxwidth=0.054 midlayer4_prefwidth=0.054 midlayer5_maxgap=0.127 midlayer5_minwidth=0.054 midlayer5_maxwidth=0.054 midlayer5_prefwidth=0.054 midlayer6_maxgap=0.127 midlayer6_minwidth=0.05 midlayer6_maxwidth=0.05 midlayer6_prefwidth=0.05 bottomlayer_mingap=0.2 bottomlayer_prefgap=0.2 bottomlayer_minwidth=0.135 bottomlayer_maxwidth=0.135 bottomlayer_prefwidth=0.135 impedanceprofiledriven=TRUE impedanceprofileid={1E88BFED-E052-4F93-92C6-38206051DADE} impedanceprofilevalue=100.000000 maxuncoupledlength=12.7
HoleSize [All] p1: absolutevalues=TRUE maxlimit=5 minlimit=0.025 maxpercent=80.000 minpercent=20.000
HoleToHoleClearance [All] p1: gap=0.2 allowstackedmicrovias=FALSE
MinimumSolderMaskSliver [NOT (InComponent('IC11') OR InComponent('IC4') OR InComponent('IC5') OR InComponent('Q4'))] p1: minsoldermaskwidth=0.08
PolygonConnect PolygonConnect_PWR [InNet('VBAT') OR InComponent('IC6') OR InComponent('IC13') OR InComponent('C63') OR InComponent('C64') OR InComponent('C65') OR InComponent('J7')    OR InComponent('C62') OR InComponent('L2') OR InComponent('C1') OR InComponent('C2')      OR InNet('+5V')  OR InNet('V2S')   OR InComponent('J14') OR InComponent('J6')     OR InComponentClass('U_MAX M10S')                           OR InComponent('J1')] p1: connectstyle=Direct reliefconductorwidth=0.254 reliefentries=4 polygonreliefangle="90 Angle" airgapwidth=0.254
PolygonConnect PolygonConnect_Via [IsVia] p2: connectstyle=Direct reliefconductorwidth=0.254 reliefentries=4 polygonreliefangle="90 Angle" airgapwidth=0.254
PolygonConnect [All] p3: connectstyle=Relief reliefconductorwidth=0.4 reliefentries=4 polygonreliefangle="90 Angle" airgapwidth=0.2
RoutingVias [All] p1: holewidth=0.3 width=0.45 viastyle="Through Hole" minholewidth=0.3 minwidth=0.45 maxholewidth=1 maxwidth=2
SilkToSilkClearance [All] p1: silktosilkclearance=0.1
SilkToSolderMaskClearance [IsPad] p1: minsilkscreentomaskgap=0.08 clearancetoexposedcopper=FALSE
SolderMaskExpansion SolderMaskExpansion_Vias [IsVia] p1: expansion=0.1 istentingtop=TRUE
SolderMaskExpansion [All] p2: expansion=0.102 istentingtop=FALSE
SupplyNets "Schematic Supply Nets_4" [InNet('+3V3_RF')] p1: voltage=0.000
SupplyNets "Schematic Supply Nets" [InNet('V2S')] p2: voltage=0.000
SupplyNets "Schematic Supply Nets_1" [InNet('VBAT')] p3: voltage=0.000
SupplyNets "Schematic Supply Nets_3" [InNet('+3V3A FC')] p4: voltage=0.000
SupplyNets "Schematic Supply Nets_27" [InNet('DGND')] p5: voltage=0.000
SupplyNets "Schematic Supply Nets_24" [InNet('AGND')] p6: voltage=0.000
SupplyNets "Schematic Supply Nets_13" [InNet('+3V3')] p7: voltage=0.000
SupplyNets "Schematic Supply Nets_2" [InNet('+5V')] p8: voltage=0.000
Width [All] p1: maxlimit=1 minlimit=0.1 preferedwidth=0.15
24 further rules are at their usual default settings.

## Classes and differential pairs
component class U_RGB-LED: J13 J15 Q6 Q7 Q8 R58 R64 R65 R66 R67 R68 R69
component class U_ADC-Buzzer: BZ1 D2 Q4 R56 R58 R61
component class U_Power: BZ1 C62 C63 C64 C65 C66 D2 D3 IC13 J13 J14 J15 L2 Q4 Q5 R49 R56 R57 R58 R59 R60 R61 R62 R63 R64
component class U_TTL: C59 C60 C61 IC11 IC12 R41 R49 R53 R54 R55 R56 R64
component class "U_Ethernet Phy": C49 C50 C51 C52 C53 C54 C55 C56 C57 C58 IC10 LED2 LED3 LED4 LED5 Q1 Q2 Q3 R20 R25 R27 R29 R30 R31 R32 R33 R34 R35 R36 R37 R38 R39 R40 R41 R42 R43 R44 R45 R46 R47 R48 R49 R50 R51 R52 R53 R56 Y2
component class U_USBC: C39 C40 C41 C42 D1 FB2 IC6 IC7 J10 J11 J13 LED2 R18 R20 R24 R25 R26
component class U_STM32H745: C3 C4 C5 C6 C7 C8 C9 C10 C11 C12 C13 C14 C15 C16 C17 C18 C19 C20 C21 C22 C23 C24 C25 C26 C27 C28 FB1 IC1 R2 R3 R4 R5 R6 R7 R8 R9 R10 R11 R12 R13 R14 R15 R16 Y1
component class "U_SD Card": C29 J10 R16
component class U_MS5611: C32 IC3
component class U_MMC5983MA: C36 C37 C38 IC5 R20 R23
component class "U_MAX M10S": C43 C44 C45 C46 C47 C48 C50 C51 J12 J13 L1 R25 R27 R28 R30 U1
component class U_ICM40609: C33 C34 C35 IC4 R18 R19 R20 R21 R22
component class U_Debug: B1 IC8 IC9 J13
component class U_BMI088: C30 C31 IC2 R11 R17 R18 R19 R20
component class TopLevel: C1 C2 J1 J2 J3 J4 J5 J6 J7 J8 J9 J10 J13 LED1 R1 R3
differential pair "FC ETH TD": +"FC ETH TD_P" -"FC ETH TD_N"
differential pair "FC ETH RD": +"FC ETH RD_P" -"FC ETH RD_N"

## Components (designator, comment, footprint, x,y, rotation, side; value= is the part's Value field where it differs from the comment)
B1 "KMR231GLFS" KMR231GLFS 56.1,63.4 r0 top
BZ1 "QMB-09B-05" QMB-09B-05 5.4,12.9 r270 top
C1 "0805,X5R,22uF,25V,20%" CAPC2012X145N 49.25,12 r90 top
C2 "0603,X7R,100nF,50V,10%" CAPC1608X90N 46.75,10.5 r135 top
C3 "0603,X7R,100nF,50V,10%" CAPC1608X90N 41.2,50 r135 top
C4 "0603,X7R,1uF,50V,10%" CAPC1608X90N 42.2,51 r135 top
C5 "0603,X7R,100nF,50V,10%" CAPC1608X90N 23.775,58.275 r225 top
C6 "0603,X7R,100nF,50V,10%" CAPC1608X90N 14,48.8 r225 top
C7 "0603,X7R,100nF,50V,10%" CAPC1608X90N 18,52.8 r225 top
C8 "0603,X7R,100nF,50V,10%" CAPC1608X90N 15.5,40 r135 top
C9 "0603,X7R,100nF,50V,10%" CAPC1608X90N 23.9,30.8 r315 top
C10 "0603,X7R,100nF,50V,10%" CAPC1608X90N 37.9,36.8 r45 top
C11 "0603,X7R,100nF,50V,10%" CAPC1608X90N 42.9,41.9 r45 top
C12 "0603,X7R,100nF,50V,10%" CAPC1608X90N 37.2,54.1 r135 top
C13 "0603,X7R,100nF,50V,10%" CAPC1608X90N 29.2,56.1 r315 bottom
C14 "0603,X7R,100nF,50V,10%" CAPC1608X90N 39.4,51.9 r135 top
C15 "0603,X7R,100nF,50V,10%" CAPC1608X90N 34.3,33.3 r45 top
C16 "0603,X7R,100nF,50V,10%" CAPC1608X90N 22.3,39.3 r315 bottom
C17 "0603,X7R,100nF,50V,10%" CAPC1608X90N 31.1,60.1 r135 top
C18 "0603,X7R,1uF,50V,10%" CAPC1608X90N 32.1,61.2 r135 top
C19 "0603,X5R,2.2uF,25V,10%" CAPC1608X90N 41.9,40 r135 top
C20 "0603,X5R,2.2uF,25V,10%" CAPC1608X90N 26.8,34.6 r135 bottom
C21 "0603,X7R,100nF,50V,10%" CAPC1608X90N 17,45.7 r225 bottom
C22 "0603,X7R,100nF,50V,10%" CAPC1608X90N 39.6,44.6 r45 bottom
C23 "0603,X5R,4.7uF,16V,10%" CAPC1608X90N 22.8,29.7 r315 top
C24 "0603,X7R,100nF,50V,10%" CAPC1608X90N 19.2,36.3 r315 top
C25 "0603,X7R,1uF,50V,10%" CAPC1608X90N 18.1,35.3 r315 top
C26 "0603,X7R,100nF,50V,10%" CAPC1608X90N 31.9,56.7 r315 bottom
C27 "0603,NP0,12pF,50V,1%" CAPC1608X90N 39.25,57.75 r270 top
C28 "0603,NP0,12pF,50V,1%" CAPC1608X90N 36.64,61 r180 top
C29 "0603,X7R,100nF,50V,10%" CAPC1608X90N 44.7,57.6 r270 top
C30 "0603,X7R,100nF,50V,10%" CAPC1608X90N 29.9,40.9 r0 bottom
C31 "0603,X7R,100nF,50V,10%" CAPC1608X90N 32,46.4 r0 bottom
C32 "0603,X7R,100nF,50V,10%" CAPC1608X90N 14.75,19.5 r0 bottom
C33 "0603,X7R,10nF,50V,10%" CAPC1608X90N 24.2,44.7 r90 bottom
C34 "0603,X7R,100nF,50V,10%" CAPC1608X90N 26.8,48.7 r180 bottom
C35 "0603,X5R,2.2uF,25V,10%" CAPC1608X90N 26.8,50.2 r180 bottom
C36 "0603,X7R,1uF,50V,10%" CAPC1608X90N 16.5,30.9 r90 bottom
C37 "0603,X7R,100nF,50V,10%" CAPC1608X90N 12,33.2 r0 bottom
C38 "0603,X5R,10uF,10V,10%" CAPC1608X90N 10.9,30 r270 bottom
C39 "0603,X7R,10nF,50V,10%" CAPC1608X90N 48.2,34.25 r90 top
C40 "0603,X7R,100nF,50V,10%" CAPC1608X90N 45.9,36.4 r180 top
C41 "0603,X5R,10uF,10V,10%" CAPC1608X90N 32.325,16.775 r0 bottom
C42 "0805,X5R,22uF,25V,20%" CAPC2012X145N 36.425,16.775 r180 bottom
C43 "0603,X5R,10uF,10V,10%" CAPC1608X90N 30.4,75.26 r270 bottom
C44 "0603,X7R,100nF,50V,10%" CAPC1608X90N 30.4,72.64 r90 bottom
C45 "0603,X7R,10nF,50V,10%" CAPC1608X90N 44.5,70.54 r90 bottom
C46 "0603,NP0,47pF,50V,5%" CAPC1608X90N 45.34,74.5 r0 bottom
C47 "DNP" CAPC1608X90N 47.4,75.16 r270 bottom
C48 "DNP" CAPC1608X90N 51.5,75.16 r270 bottom
C49 "0603,X7R,100nF,50V,10%" CAPC1608X90N 24,68.75 r180 top
C50 "0603,X7R,100nF,50V,10%" CAPC1608X90N 13.75,74 r180 top
C51 "0603,X7R,1uF,50V,10%" CAPC1608X90N 18.1,60.5 r90 top
C52 "0603,X7R,100nF,50V,10%" CAPC1608X90N 21.7,74.6 r270 top
C53 "0603,X7R,100nF,50V,10%" CAPC1608X90N 7.74,62.9 r0 top
C54 "0603,X7R,100nF,50V,10%" CAPC1608X90N 19.125,64 r270 bottom
C55 "0603,X5R,10uF,10V,10%" CAPC1608X90N 21.325,63.675 r180 bottom
C56 "0603,X7R,100nF,50V,10%" CAPC1608X90N 14.5,64.025 r90 bottom
C57 "0603,X7R,100nF,50V,10%" CAPC1608X90N 4.7,61.94 r90 top
C58 "0603,X7R,100nF,50V,10%" CAPC1608X90N 30,76.7 r270 top
C59 "0603,X7R,100nF,50V,10%" CAPC1608X90N 25.35,17.425 r90 top
C60 "0603,X7R,100nF,50V,10%" CAPC1608X90N 18.05,23.225 r180 top
C61 "0603,X7R,100nF,50V,10%" CAPC1608X90N 22.25,23.225 r0 top
C62 "0603,X7R,100nF,50V,10%" CAPC1608X90N 38.2,18.2 r90 top
C63 "0805,X5R,10uF,50V,10%" CAPC2012X145N 41.5,21.6 r0 top
C64 "0805,X5R,22uF,25V,20%" CAPC2012X145N 39.1,15.1 r180 top
C65 "0805,X5R,22uF,25V,20%" CAPC2012X145N 39.1,13.1 r180 top
C66 "0603,NP0,47pF,50V,5%" CAPC1608X90N 42.4,19.1 r270 bottom
D1 "1N5819HW-7-F" SOD3716X125N 45.7,31.6 r90 top
D2 "BAT54XV2T1G" SOD523 10.9,13 r270 top
D3 "BAT54XV2T1G" SOD523 45,44.6 r0 top
FB1 "600R@100MHz" BLM18SP221SN1B 30.25,62.25 r45 top
FB2 "33R@100MHz" BLM18SP221SN1B 45.9,34.9 r180 top
IC1 "STM32H745ZIT6" QFP50P2200X2200X160-144N 28.2,45.1 r225 top
IC2 "BMI088" BMI088 31.7,43.6 r180 bottom
IC3 "MS561101BA03-50" MSI-MS561101BA03-50-8_V 13.4,22.2 r90 bottom
IC4 "ICM-40609-D" LGA-24_L3.0-W3.0-P0.40-TL 26.8,46.1 r90 bottom
IC5 "MMC5983MA" LGA-16_L3.0-W3.0-P0.50-BL_SQ 13.475,30.7 r270 bottom
IC6 "AMS1117-3.3" SOT230P700X180-4N 35.425,22.225 r90 bottom
IC7 "ESDA6V1BC6" SOT95P280X145-6N 49,37.8 r270 top
IC8 "ESDA6V1BC6" SOT95P280X145-6N 49.1,53.7 r180 top
IC9 "ESDA6V1BC6" SOT95P280X145-6N 49,59 r0 top
IC10 "DP83848IVVX_NOPB" QFP50P900X900X160-48N 16.4,67.9 r0 top
IC11 "TXS0104EPWR" TXB0104PWR 20.05,19.825 r270 top
IC12 "SN74LVC2G241DCTR" SOP65P400X130-8N 27.85,16.125 r90 top
IC13 "AP63300WU-7" SOT95P280X90-6N 41.1,18.95 r180 top
J1 "BUS-PCIe-x8" BUS_PCIEXPRESS_X8 -4.95,84.35 r270 top
J2 "S4B-PH-K-S(LF)(SN)" S4B-PH-K-S-_LF_SN 43.5,83.2 r180 top
J3 "S4B-PH-K-S(LF)(SN)" S4B-PH-K-S-_LF_SN 16.5,83.2 r180 top
J4 "S4B-PH-K-S(LF)(SN)" S4B-PH-K-S-_LF_SN 30,83.2 r180 top
J5 "S4B-PH-K-S(LF)(SN)" S4B-PH-K-S-_LF_SN 15.5,6.6 r0 top
J6 "S2B-PH-K-S(LF)(SN)" S2B-PH-K-S_LF_SN 53.5,11.9 r270 top
J7 "S3B-PH-K-S(LF)(SN)" S3B-PH-K-S-_LF_SN 43.5,6.6 r0 top
J8 "S2B-PH-K-S(LF)(SN)" S2B-PH-K-S_LF_SN 34,6.6 r180 top
J9 "S2B-PH-K-S(LF)(SN)" S2B-PH-K-S_LF_SN 26,6.6 r180 top
J10 "TF-01A" TF-SMD_TF-01A 50,55.4 r270 bottom
J11 "GT-USB-7010ASV" USB-C-SMD_G-SWITCH_GT-USB-7010ASV 54.5,38 r90 top
J12 "BWSMA-KWE-Z001" SMA-TH_BWSMA-KWE-Z001 56,74.5 r0 top
J13 "HB-PH9-12727PB2GOB" HB-PH9-12727PB2GOB 55.6,56.3 r90 top
J14 "XT60PW-F_C428722" XT60PW-F_C428722 54.7,23.95 r270 top
J15 "DB125-2.54-4P-GN-S" DB125-2_54-4P-GN 4,26.69 r270 top
L1 "0603,27nH,500mA" INDC1608X90N 46,72.34 r270 bottom
L2 "6.8uH,5A,48mR" FXL0630-6R8-M 34,16.1 r270 top
LED1 "0603,RED" LEDC1608X36N 54.1,46.8 r270 top
LED2 "0603,GREEN" LEDC1608X36N 57.9,46.9 r270 top
LED3 "0603,RED" LEDC1608X36N 3.95,42.886 r90 top
LED4 "0603,GREEN" LEDC1608X36N 3.95,48.518 r90 top
LED5 "0603,YELLOW" LEDC1608X36N 3.95,54.367 r90 top
Q1 "2N7002" SOT95P230X110-3N 7.175,41.928 r180 top
Q2 "2N7002" SOT95P230X110-3N 7.175,47.787 r180 top
Q3 "2N7002" SOT95P230X110-3N 7.175,53.164 r180 top
Q4 "BSS8402DW-7-F" SOT65P210X110-6N 48.3,48 r0 top
Q5 "2N7002" SOT95P230X110-3N 13.3,12.3 r0 top
Q6 "2N7002" SOT95P230X110-3N 4.9,34 r180 top
Q7 "2N7002" SOT95P230X110-3N 11.3,30.3 r180 top
Q8 "2N7002" SOT95P230X110-3N 5.9,19.4 r270 top
R1 "0603,470R,1%" RESC1608X90N 51.6,44 r0 top
R2 "0603,0R,1%" RESC1608X90N 33.1,62.3 r315 top
R3 "0603,10K,1%" RESC1608X90N 40.3,37.5 r270 top
R4 "0603,1K,1%" RESC1608X90N 18.913,54.756 r315 top
R5 "0603,33R,1%" RESC1608X90N 11.4,48.5 r135 bottom
R6 "0603,1K,1%" RESC1608X90N 19.9,55.8 r315 top
R7 "0603,33R,1%" RESC1608X90N 11.8,44.7 r135 bottom
R8 "0603,33R,1%" RESC1608X90N 14.9,50.875 r135 top
R9 "0603,10K,1%" RESC1608X90N 26.8,52.1 r0 bottom
R10 "0603,10K,1%" RESC1608X90N 32.5,49.6 r90 bottom
R11 "0603,10K,1%" RESC1608X90N 41.7,47.8 r90 bottom
R12 "0603,10K,1%" RESC1608X90N 38.1,45.9 r225 bottom
R13 "0603,10K,1%" RESC1608X90N 21.625,43.675 r270 bottom
R14 "0603,10K,1%" RESC1608X90N 9.3,22.7 r270 bottom
R15 "0603,10K,1%" RESC1608X90N 16.3,27.5 r180 bottom
R16 "0603,10K,1%" RESC1608X90N 41.6,63 r180 bottom
R17 "0603,10K,1%" RESC1608X90N 35.9,43.6 r0 bottom
R18 "0603,10K,1%" RESC1608X90N 39.5,49.1 r315 bottom
R19 "0603,10K,1%" RESC1608X90N 32.1,54.1 r135 bottom
R20 "0603,10K,1%" RESC1608X90N 34.5,52.5 r315 bottom
R21 "0603,10K,1%" RESC1608X90N 24.7,49.5 r90 bottom
R22 "0603,10K,1%" RESC1608X90N 29.5,48.1 r90 bottom
R23 "0603,10K,1%" RESC1608X90N 12.1,34.6 r180 bottom
R24 "0603,1K,1%" RESC1608X90N 57,44 r0 top
R25 "0603,5.1K,1%" RESC1608X55N 50.5,33.7 r90 top
R26 "0603,5.1K,1%" RESC1608X55N 49.4,41.7 r180 top
R27 "0603,0R,1%" RESC1608X90N 36,78.2 r180 bottom
R28 "0603,0R,1%" RESC1608X90N 49.44,74.5 r0 bottom
R29 "0603,470R,1%" RESC1608X90N 1.95,42.761 r270 top
R30 "0603,470R,1%" RESC1608X90N 1.95,48.7 r270 top
R31 "0603,470R,1%" RESC1608X90N 1.95,54.278 r270 top
R32 "DNP" RESC1608X90N 11.6,41.825 r90 top
R33 "0603,2.2K,1%" RESC1608X90N 11.6,47.475 r90 top
R34 "0603,2.2K,1%" RESC1608X90N 11.85,53.003 r90 top
R35 "0603,2.2K,1%" RESC1608X90N 9.975,41.825 r270 top
R36 "DNP" RESC1608X90N 9.975,47.475 r270 top
R37 "DNP" RESC1608X90N 10.15,53.035 r270 top
R38 "0603,2.2K,1%" RESC1608X90N 16,64.25 r90 bottom
R39 "0603,2.2K,1%" RESC1608X90N 17.625,64.25 r90 bottom
R40 "0603,2.2K,1%" RESC1608X90N 8.765,68.2 r0 bottom
R41 "0603,33R,1%" RESC1608X90N 26.95,71.7 r90 top
R42 "0603,49.9R,1%" RESC1608X90N 4.7,64.84 r270 top
R43 "0603,49.9R,1%" RESC1608X90N 6.7,64.84 r270 top
R44 "0603,33R,1%" RESC1608X90N 25.55,71.7 r90 top
R45 "0603,33R,1%" RESC1608X90N 24.2,65.25 r180 top
R46 "0603,1.5K,1%" RESC1608X90N 24.225,67.325 r180 top
R47 "0603,2.2K,1%" RESC1608X90N 20.25,74.75 r270 top
R48 "0603,10K,1%" RESC1608X90N 11,70.2 r270 bottom
R49 "0603,33R,1%" RESC1608X90N 28.25,71.7 r90 top
R50 "0603,49.9R,1%" RESC1608X90N 10.4,64.84 r90 top
R51 "0603,49.9R,1%" RESC1608X90N 8.5,64.84 r90 top
R52 "0603,4.87K,1%" RESC1608X55N 19.75,60.5 r270 top
R53 "0603,10K,1%" RESC1608X90N 28.95,19.925 r0 top
R54 "0603,10K,1%" RESC1608X90N 28.3,12.4 r0 top
R55 "0603,10K,1%" RESC1608X90N 21.95,16.425 r0 top
R56 "0603,10K,1%" RESC1608X90N 25.35,13.325 r90 top
R57 "0603,158K,1%" RESC1608X90N 43.8,19.1 r270 bottom
R58 "0603,30K,1%" RESC1608X90N 45.3,19.1 r90 bottom
R59 "0603,10K,1%" RESC1608X90N 51.2,47.4 r270 top
R60 "0603,1K,1%" RESC1608X90N 46.5,46 r0 top
R61 "0603,10K,1%" RESC1608X90N 45.7,48.8 r270 top
R62 "0603,120R,1%" RESC1608X90N 48.1,44.5 r180 top
R63 "0603,10K,1%" RESC1608X90N 13.6,15 r180 top
R64 "0603,470R,1%" RESC1608X90N 2.3,33.9 r270 top
R65 "0603,10K,1%" RESC1608X90N 8.2,33.1 r180 top
R66 "0603,470R,1%" RESC1608X90N 10.4,26.8 r270 top
R67 "0603,10K,1%" RESC1608X90N 14.1,30.6 r270 top
R68 "0603,470R,1%" RESC1608X90N 3.3,19.5 r90 top
R69 "0603,10K,1%" RESC1608X90N 8.5,19.7 r90 top
U1 "MAX-M10S-00B" XCVR_MAX-M10S-00B 37.25,71.2 r0 bottom
Y1 "24MHz,10ppm" CRYSTAL-SMD_4P-L3.2-W2.5-BL 36.65,58.1 r270 top
Y2 "SX3M50.000M20F30TNN" SX3M50_000M20F30TNN 26.9,76.85 r180 top

## Footprints (in the part's own frame and the unit in brackets; to place one, negate y for a bottom-side part, rotate by r counter-clockwise, add the part's x,y. Pads: shape width x height; smd on the part's side, far side on the other; paste and mask are expansions set on the pad)
BLM18SP221SN1B [mm]
  rect 0.65x0.7 smd: 1(-0.675,0) 2(0.675,0)
  silkscreen extent 0,-0.3 0,0.3, body extent -0.8,-0.4 0.8,0.4, height 0.8
BMI088 [mm]
  rect 0.3x0.75 smd: 1(-1.5,1.3) 2(-1,1.3) 3(-0.5,1.3) 4(0,1.3) 5(0.5,1.3) 6(1,1.3) 7(1.5,1.3) 9(1.5,-1.3) 10(1,-1.3) 11(0.5,-1.3) 12(0,-1.3) 13(-0.5,-1.3) 14(-1,-1.3) 15(-1.5,-1.3)
  rect 0.75x0.3 smd: 8(2.05,0) 16(-2.05,0)
  silkscreen extent -2.5,-1.8 2.5,2.51, body extent -2.25,-1.5 2.25,1.5, height 1.01
BUS_PCIEXPRESS_X8 [mm]
  rect 0.7x4.3 smd: 1(0,0) 2(1,0) 3(2,0) 4(3,0) 5(4,0) 6(5,0) 7(6,0) 8(7,0) 9(8,0) 10(9,0) 11(10,0) 12(13,0) 13(14,0) 14(15,0) 15(16,0) 16(17,0) 17(18,0) 18(19,0) 19(20,0) 20(21,0) 21(22,0) 22(23,0) 23(24,0) 24(25,0) 25(26,0) 26(27,0) 27(28,0) 28(29,0) 29(30,0) 30(31,0) 31(32,0) 32(33,0) 33(34,0) 34(35,0) 35(36,0) 36(37,0) 37(38,0) 38(39,0) 39(40,0) 40(41,0) 41(42,0) 42(43,0) 43(44,0) 44(45,0) 45(46,0) 46(47,0) 47(48,0) 49(50,0)
  rect 0.7x3.2 smd: 48(49,0.55)
  rect 0.7x3.2 smd far side: 50(0,0.55)
  rect 0.7x4.3 smd far side: 51(1,0) 52(2,0) 53(3,0) 54(4,0) 55(5,0) 56(6,0) 57(7,0) 58(8,0) 59(9,0) 60(10,0) 61(13,0) 62(14,0) 63(15,0) 64(16,0) 65(17,0) 66(18,0) 67(19,0) 68(20,0) 69(21,0) 70(22,0) 71(23,0) 72(24,0) 73(25,0) 74(26,0) 75(27,0) 76(28,0) 77(29,0) 78(30,0) 79(31,0) 80(32,0) 81(33,0) 82(34,0) 83(35,0) 84(36,0) 85(37,0) 86(38,0) 87(39,0) 88(40,0) 89(41,0) 90(42,0) 91(43,0) 92(44,0) 93(45,0) 94(46,0) 95(47,0) 96(48,0) 97(49,0) 98(50,0)
CAPC1608X90N [mm]
  rect 0.83x0.94 smd: 1(-0.66,0) 2(0.66,0)
  body extent -0.8,-0.4 0.8,0.4, height 0.9
CAPC2012X145N [mm]
  rect 1.02x1.47 smd: 1(-0.8,0) 2(0.8,0)
  body extent -1,-0.63 1,0.63, height 1.45
CRYSTAL-SMD_4P-L3.2-W2.5-BL [mm]
  rect 1.4x1.2 smd: 1(-1.1,-0.85) 2(1.1,-0.85) 3(1.1,0.85) 4(-1.1,0.85)
  silkscreen extent -2.16,-1.78 2.16,1.78, body extent -1.6,-1.25 1.6,1.25, height 0.7
DB125-2_54-4P-GN [mm]
  rect 1.8x1.8 hole 1.1: 1(-3.81,0)
  rrect100% 1.8x1.8 hole 1.1: 2(-1.27,0) 3(1.27,0) 4(3.81,0)
  silkscreen extent -5.32,-3.14 5.32,3.14, body extent -5.32,-3.13 5.32,3.14, height 8.5
FXL0630-6R8-M [mm]
  rect 2.4x3.2 smd: 1(-3,0) 2(3,0)
  silkscreen extent -3.5,-3.3 3.5,3.3, body extent -3.5,-3.3 3.5,3.3, height 3.1
HB-PH9-12727PB2GOB [mm]
  rect 0.74x2.5 smd: 1(-3.81,-2.25) 2(-3.81,2.25) 3(-2.54,-2.25) 4(-2.54,2.25) 5(-1.27,-2.25) 6(-1.27,2.25) 7(0,-2.25) 8(0,2.25) 9(1.27,-2.25) 10(1.27,2.25) 11(2.54,-2.25) 12(2.54,2.25) 13(3.81,-2.25) 14(3.81,2.25)
  body extent -4.45,-2.75 4.44,2.75, height 5.5
INDC1608X90N [mm]
  rect 0.83x0.94 smd: 1(-0.66,0) 2(0.66,0)
  body extent -0.8,-0.4 0.8,0.4, height 0.95
KMR231GLFS [mm]
  rect 1x1.1 smd: 1(-2.3,0.438) 2(2.3,0.438) 3(-2.3,-1.162) 4(2.3,-1.162)
  rect 2x0.7 smd: 5(0,1.162)
  silkscreen extent -1.5,-1.7 1.5,0.15, body extent -2.27,-1.78 2.33,1.07, height 1.95
LEDC1608X36N [mm]
  rect 0.7x0.95 smd: 1(-0.9,0) 2(0.9,0)
  silkscreen extent -1.6,-0.82 0.9,0.82, body extent -0.81,-0.4 0.81,0.4, height 0.59
LGA-16_L3.0-W3.0-P0.50-BL_SQ [mm]
  rect 0.25x0.45 smd: 1(-0.75,-1.26) 2(-0.25,-1.26) 3(0.25,-1.26) 4(0.75,-1.26) 9(0.75,1.26) 10(0.25,1.26) 11(-0.25,1.26) 12(-0.75,1.26)
  rect 0.45x0.25 smd: 5(1.26,-0.75) 6(1.26,-0.25) 7(1.26,0.25) 8(1.26,0.75) 13(-1.26,0.75) 14(-1.26,0.25) 15(-1.26,-0.25) 16(-1.26,-0.75)
  silkscreen extent -1.61,-2.03 1.6,1.6, body extent -1.5,-1.5 1.5,1.5, height 0.92
LGA-24_L3.0-W3.0-P0.40-TL [mm]
  round 0.01 smd: 1(-1.43,1) 6(-1.43,-1) 7(-1,-1.43) 12(1,-1.43) 13(1.43,-1) 18(1.43,1) 19(1,1.43) 24(-1,1.43)
  round 0.025 smd: 1(-1.425,1.005) 6(-1.425,-1) 7(-1,-1.425) 12(1,-1.425) 13(1.425,-1) 18(1.425,1) 19(1,1.425) 24(-1,1.425)
  rect 0.51x0.2 smd: 2(-1.43,0.6) 3(-1.43,0.2) 4(-1.43,-0.2) 5(-1.43,-0.6) 14(1.43,-0.6) 15(1.43,-0.2) 16(1.43,0.2) 17(1.43,0.6)
  rect 0.2x0.51 smd: 8(-0.6,-1.43) 9(-0.2,-1.43) 10(0.2,-1.43) 11(0.6,-1.43) 20(0.6,1.43) 21(0.2,1.43) 22(-0.2,1.43) 23(-0.6,1.43)
  Top Layer (SIG) region: 1.68,0.9 1.17,0.9 1.17,1 1.29,1.1 1.68,1.1
  Top Layer (SIG) region: 1.68,-1.1 1.29,-1.1 1.17,-1 1.17,-0.9 1.68,-0.9
  Top Layer (SIG) region: -1.17,-1 -1.29,-1.1 -1.68,-1.1 -1.68,-0.9 -1.17,-0.9
  Top Layer (SIG) region: -0.9,-1.68 -1.1,-1.68 -1.1,-1.29 -1,-1.17 -0.9,-1.17
  Top Layer (SIG) region: 1.1,-1.29 1.1,-1.68 0.9,-1.68 0.9,-1.17 1,-1.17
  Top Layer (SIG) region: 1.1,1.29 1,1.17 0.9,1.17 0.9,1.68 1.1,1.68
  Top Layer (SIG) region: -0.9,1.17 -1,1.17 -1.1,1.29 -1.1,1.68 -0.9,1.68
  Top Layer (SIG) region: -1.3,1.1 -1.17,1 -1.17,0.9 -1.68,0.9 -1.68,1.11
  silkscreen extent -2.02,-1.65 1.65,1.65, body extent -1.5,-1.5 1.5,1.5, height 0.95
MSI-MS561101BA03-50-8_V [mm] "SMD, 8-Leads, Body 5x3mm, Pitch 1.25mm"
  rect 1.1x0.6 smd: 1(-1.1,1.875) 2(-1.1,0.625) 3(-1.1,-0.625) 4(-1.1,-1.875) 5(1.1,-1.875) 6(1.1,-0.625) 7(1.1,0.625) 8(1.1,1.875)
  silkscreen extent -1.22,-2.5 0.15,3.13, body extent -1.5,-2.5 1.5,2.5, height 1
QFP50P900X900X160-48N [mm]
  rect 1.475x0.3 smd: 1(-4.238,2.75) 2(-4.238,2.25) 3(-4.238,1.75) 4(-4.238,1.25) 5(-4.238,0.75) 6(-4.238,0.25) 7(-4.238,-0.25) 8(-4.238,-0.75) 9(-4.238,-1.25) 10(-4.238,-1.75) 11(-4.238,-2.25) 12(-4.238,-2.75) 25(4.238,-2.75) 26(4.238,-2.25) 27(4.238,-1.75) 28(4.238,-1.25) 29(4.238,-0.75) 30(4.238,-0.25) 31(4.238,0.25) 32(4.238,0.75) 33(4.238,1.25) 34(4.238,1.75) 35(4.238,2.25) 36(4.238,2.75)
  rect 0.3x1.475 smd: 13(-2.75,-4.238) 14(-2.25,-4.238) 15(-1.75,-4.238) 16(-1.25,-4.238) 17(-0.75,-4.238) 18(-0.25,-4.238) 19(0.25,-4.238) 20(0.75,-4.238) 21(1.25,-4.238) 22(1.75,-4.238) 23(2.25,-4.238) 24(2.75,-4.238) 37(2.75,4.238) 38(2.25,4.238) 39(1.75,4.238) 40(1.25,4.238) 41(0.75,4.238) 42(0.25,4.238) 43(-0.25,4.238) 44(-0.75,4.238) 45(-1.25,4.238) 46(-1.75,4.238) 47(-2.25,4.238) 48(-2.75,4.238)
  silkscreen extent -4.85,-3.15 3.15,3.62, body extent -4.5,-4.5 4.5,4.5, height 1.6
QFP50P2200X2200X160-144N [mm]
  rect 1.475x0.3 smd: 1(-10.738,8.75) 2(-10.738,8.25) 3(-10.738,7.75) 4(-10.738,7.25) 5(-10.738,6.75) 6(-10.738,6.25) 7(-10.738,5.75) 8(-10.738,5.25) 9(-10.738,4.75) 10(-10.738,4.25) 11(-10.738,3.75) 12(-10.738,3.25) 13(-10.738,2.75) 14(-10.738,2.25) 15(-10.738,1.75) 16(-10.738,1.25) 17(-10.738,0.75) 18(-10.738,0.25) 19(-10.738,-0.25) 20(-10.738,-0.75) 21(-10.738,-1.25) 22(-10.738,-1.75) 23(-10.738,-2.25) 24(-10.738,-2.75) 25(-10.738,-3.25) 26(-10.738,-3.75) 27(-10.738,-4.25) 28(-10.738,-4.75) 29(-10.738,-5.25) 30(-10.738,-5.75) 31(-10.738,-6.25) 32(-10.738,-6.75) 33(-10.738,-7.25) 34(-10.738,-7.75) 35(-10.738,-8.25) 36(-10.738,-8.75) 73(10.738,-8.75) 74(10.738,-8.25) 75(10.738,-7.75) 76(10.738,-7.25) 77(10.738,-6.75) 78(10.738,-6.25) 79(10.738,-5.75) 80(10.738,-5.25) 81(10.738,-4.75) 82(10.738,-4.25) 83(10.738,-3.75) 84(10.738,-3.25) 85(10.738,-2.75) 86(10.738,-2.25) 87(10.738,-1.75) 88(10.738,-1.25) 89(10.738,-0.75) 90(10.738,-0.25) 91(10.738,0.25) 92(10.738,0.75) 93(10.738,1.25) 94(10.738,1.75) 95(10.738,2.25) 96(10.738,2.75) 97(10.738,3.25) 98(10.738,3.75) 99(10.738,4.25) 100(10.738,4.75) 101(10.738,5.25) 102(10.738,5.75) 103(10.738,6.25) 104(10.738,6.75) 105(10.738,7.25) 106(10.738,7.75) 107(10.738,8.25) 108(10.738,8.75)
  rect 0.3x1.475 smd: 37(-8.75,-10.738) 38(-8.25,-10.738) 39(-7.75,-10.738) 40(-7.25,-10.738) 41(-6.75,-10.738) 42(-6.25,-10.738) 43(-5.75,-10.738) 44(-5.25,-10.738) 45(-4.75,-10.738) 46(-4.25,-10.738) 47(-3.75,-10.738) 48(-3.25,-10.738) 49(-2.75,-10.738) 50(-2.25,-10.738) 51(-1.75,-10.738) 52(-1.25,-10.738) 53(-0.75,-10.738) 54(-0.25,-10.738) 55(0.25,-10.738) 56(0.75,-10.738) 57(1.25,-10.738) 58(1.75,-10.738) 59(2.25,-10.738) 60(2.75,-10.738) 61(3.25,-10.738) 62(3.75,-10.738) 63(4.25,-10.738) 64(4.75,-10.738) 65(5.25,-10.738) 66(5.75,-10.738) 67(6.25,-10.738) 68(6.75,-10.738) 69(7.25,-10.738) 70(7.75,-10.738) 71(8.25,-10.738) 72(8.75,-10.738) 109(8.75,10.738) 110(8.25,10.738) 111(7.75,10.738) 112(7.25,10.738) 113(6.75,10.738) 114(6.25,10.738) 115(5.75,10.738) 116(5.25,10.738) 117(4.75,10.738) 118(4.25,10.738) 119(3.75,10.738) 120(3.25,10.738) 121(2.75,10.738) 122(2.25,10.738) 123(1.75,10.738) 124(1.25,10.738) 125(0.75,10.738) 126(0.25,10.738) 127(-0.25,10.738) 128(-0.75,10.738) 129(-1.25,10.738) 130(-1.75,10.738) 131(-2.25,10.738) 132(-2.75,10.738) 133(-3.25,10.738) 134(-3.75,10.738) 135(-4.25,10.738) 136(-4.75,10.738) 137(-5.25,10.738) 138(-5.75,10.738) 139(-6.25,10.738) 140(-6.75,10.738) 141(-7.25,10.738) 142(-7.75,10.738) 143(-8.25,10.738) 144(-8.75,10.738)
  silkscreen extent -11.35,-9.65 9.65,9.65, body extent -10.95,-10.95 10.95,10.95, height 1.6
QMB-09B-05 [mm]
  rrect100% 1.8x1.8 hole 1: 1(-2,0) 2(2,0)
  silkscreen extent -4.5,-4.5 4.5,4.5, body extent -4.5,-4.5 4.5,4.5, height 5.51
RESC1608X55N [mm]
  rect 0.8x0.95 smd: 1(-0.8,0) 2(0.8,0)
  silkscreen extent 0,-0.3 0,0.3, body extent -0.8,-0.4 0.8,0.4, height 0.55
RESC1608X90N [mm]
  rect 0.83x0.94 smd: 1(-0.66,0) 2(0.66,0)
  body extent -0.8,-0.4 0.8,0.4, height 0.55
S2B-PH-K-S_LF_SN [mm]
  rect 1.5x1.4 hole 0.85: 1(1,0)
  rrect100% 1.4x1.4 hole 0.85: 2(-1,0)
  silkscreen extent -3,-1.4 3,6.2, body extent -3,-1.45 3,6.25, height 5.05
S3B-PH-K-S-_LF_SN [mm]
  rect 1.5x1.5 hole 0.9: 1(-2,0)
  rrect100% 1.5x1.5 hole 0.9: 2(0,0) 3(2,0)
  silkscreen extent -3.95,-6.25 3.95,1.35, body extent -3.95,-6.2 3.95,1.4, height 4.8
S4B-PH-K-S-_LF_SN [mm]
  rect 1.5x1.5 hole 1: 1(-3,0)
  rrect100% 1.5x1.5 hole 1: 2(-1,0) 3(1,0) 4(3,0)
  silkscreen extent -5,-6.3 5,1.3, body extent -4.95,-6.2 4.95,1.4, height 4.8
SMA-TH_BWSMA-KWE-Z001 [mm]
  round 2.2 hole 1.6: 1(-2.55,-2.55) 2(-2.55,2.55) 3(2.55,2.55) 4(2.55,-2.55)
  round 2 hole 1.3: 5(0,0)
  silkscreen extent -3,-3 3,3, body extent -3,-3.17 11.5,3.17, height 9.77
SOD523 [mm]
  rect 0.5x0.4 smd: 1(-0.7,0) 2(0.7,0)
  silkscreen extent -1.25,-0.3 -1.25,0.3, body extent -0.8,-0.4 0.8,0.4, height 0.61
SOD3716X125N [mm]
  rect 1.25x0.75 smd: 1(-1.65,0) 2(1.65,0)
  silkscreen extent -2.87,-0.8 1.35,0.8, body extent -1.35,-0.8 1.35,0.8, height 1.25
SOP65P400X130-8N [mm]
  rect 1.1x0.45 smd: 1(-1.95,0.975) 2(-1.95,0.325) 3(-1.95,-0.325) 4(-1.95,-0.975) 5(1.95,-0.975) 6(1.95,-0.325) 7(1.95,0.325) 8(1.95,0.975)
  silkscreen extent -2.5,-1.47 1.05,1.55, body extent -2.01,-1.48 2.01,1.48, height 0.91
SOT65P210X110-6N [mm]
  rect 0.6x0.42 smd: 1(-0.95,0.65) 2(-0.95,0) 3(-0.95,-0.65) 4(0.95,-0.65) 5(0.95,0) 6(0.95,0.65)
  silkscreen extent -1.5,-1 0.15,1.2, body extent -1.05,-1.08 1.05,1.07, height 1.09
SOT95P230X110-3N [mm]
  rect 1.05x0.6 smd: 1(-1.1,0.95) 2(-1.1,-0.95) 3(1.1,0)
  silkscreen extent -1.6,-1.45 0.23,1.63, body extent -1.2,-1.45 1.2,1.45, height 0.95
SOT95P280X90-6N [mm]
  rect 1.05x0.55 smd: 1(-1.3,0.95) 2(-1.3,0) 3(-1.3,-0.95) 4(1.3,-0.95) 5(1.3,0) 6(1.3,0.95)
  silkscreen extent -1.83,-1.45 0.43,1.58, body extent -1.4,-1.45 1.4,1.45, height 0.9
SOT95P280X145-6N [mm]
  rect 1.15x0.6 smd: 1(-1.3,0.95) 2(-1.3,0) 3(-1.3,-0.95) 4(1.3,-0.95) 5(1.3,0) 6(1.3,0.95)
  silkscreen extent -1.88,-1.46 0.38,1.6, body extent -1.4,-1.46 1.4,1.46, height 1.45
SOT230P700X180-4N [mm]
  rect 1.75x0.95 smd: 1(-3.15,2.3) 2(-3.15,0) 3(-3.15,-2.3)
  rect 1.75x3.2 smd: 4(3.15,0)
  silkscreen extent -4.05,-3.25 1.75,3.3, body extent -3.5,-3.25 3.5,3.25, height 1.68
SX3M50_000M20F30TNN [mm]
  rect 1.4x1.2 smd: 1(-1.1,-0.85) 2(1.1,-0.85) 3(1.1,0.85) 4(-1.1,0.85)
  silkscreen extent -2.2,-2.25 2.2,1.8, body extent -1.6,-1.25 1.6,1.25, height 0.95
TF-SMD_TF-01A [mm]
  rect 0.6x1.3 smd: 1(2.24,5.28) 2(1.14,5.28) 3(0.04,5.28) 4(-1.06,5.28) 5(-2.16,5.28) 6(-3.26,5.28) 7(-4.36,5.28) 8(-5.46,5.28) 9(-6.56,5.28)
  rect 1.2x1.4 smd: 10(-7.76,4.43) 13(6.92,4.43)
  rect 1.2x2 smd: 11(-7.76,-5.28) 12(7.76,-5.28)
  round 0.9 hole 0.9: Un1(-4.95,-5.57) Un2(3.05,-5.57)
  silkscreen extent -7.37,-9.58 7.37,3.32, body extent -8.05,-9.61 8.05,5.4, height 1.8
TXB0104PWR [mm]
  rect 0.4x1.7 smd: 1(-1.95,-2.8) 2(-1.3,-2.8) 3(-0.65,-2.8) 4(0,-2.8) 5(0.65,-2.8) 6(1.3,-2.8) 7(1.95,-2.8) 8(1.95,2.8) 9(1.3,2.8) 10(0.65,2.8) 11(0,2.8) 12(-0.65,2.8) 13(-1.3,2.8) 14(-1.95,2.8)
  silkscreen extent -2.51,-4.5 2.5,1.67, body extent -2.5,-3.01 2.5,3.01, height 1.03
USB-C-SMD_G-SWITCH_GT-USB-7010ASV [mm]
  rrect100% 1x2.1 hole 1.7 slot 0.6 at 0 deg: 1(-4.32,1.78) 2(4.32,1.78)
  rrect100% 1x1.8 hole 1.4 slot 0.6 at 0 deg: 3(4.32,-2.4) 4(-4.32,-2.4)
  rect 0.6x1.24 smd: A1B12(-3.2,2.4) A4B9(-2.4,2.4) B1A12(3.2,2.4) B4A9(2.4,2.4)
  rect 0.3x1.24 smd: A5(-1.25,2.4) A6(-0.25,2.4) A7(0.25,2.4) A8(1.25,2.4) B5(1.75,2.4) B6(0.75,2.4) B7(-0.75,2.4) B8(-1.75,2.4)
  round 0.65 hole 0.65: Un1(2.89,1.28) Un2(-2.9,1.28)
  silkscreen extent -4.5,-4.8 4.5,0.3, body extent -4.47,-5.05 4.47,2.85, height 3.16
XCVR_MAX-M10S-00B [mm]
  rect 1.8x0.7 smd paste-2: 1(-4.75,4.4) 9(-4.75,-4.4) 10(4.75,-4.4) 18(4.75,4.4)
  rect 1.8x0.8 smd paste-2: 2(-4.75,3.3) 3(-4.75,2.2) 4(-4.75,1.1) 5(-4.75,0) 6(-4.75,-1.1) 7(-4.75,-2.2) 8(-4.75,-3.3) 11(4.75,-3.3) 12(4.75,-2.2) 13(4.75,-1.1) 14(4.75,0) 15(4.75,1.1) 16(4.75,2.2) 17(4.75,3.3)
  silkscreen extent -6.85,-5.35 3.49,5.05, body extent -4.85,-5.35 4.85,5.05, height 2.7
XT60PW-F_C428722 [mm]
  rrect100% 1.3x2.2 hole 0.6 slot 1.5 at 90 deg: 1(-6.75,3) 2(6.75,3)
  rrect100% 3.8x3.8 hole 2.8: 3(-3.6,-3) 4(3.6,-3)
  body extent -7.8,-4.69 7.7,12.51, height 8.4